# EAGLE board Qwiic-USB_Hub-Panel (EAGLE 9.6.2), part 1 of 2
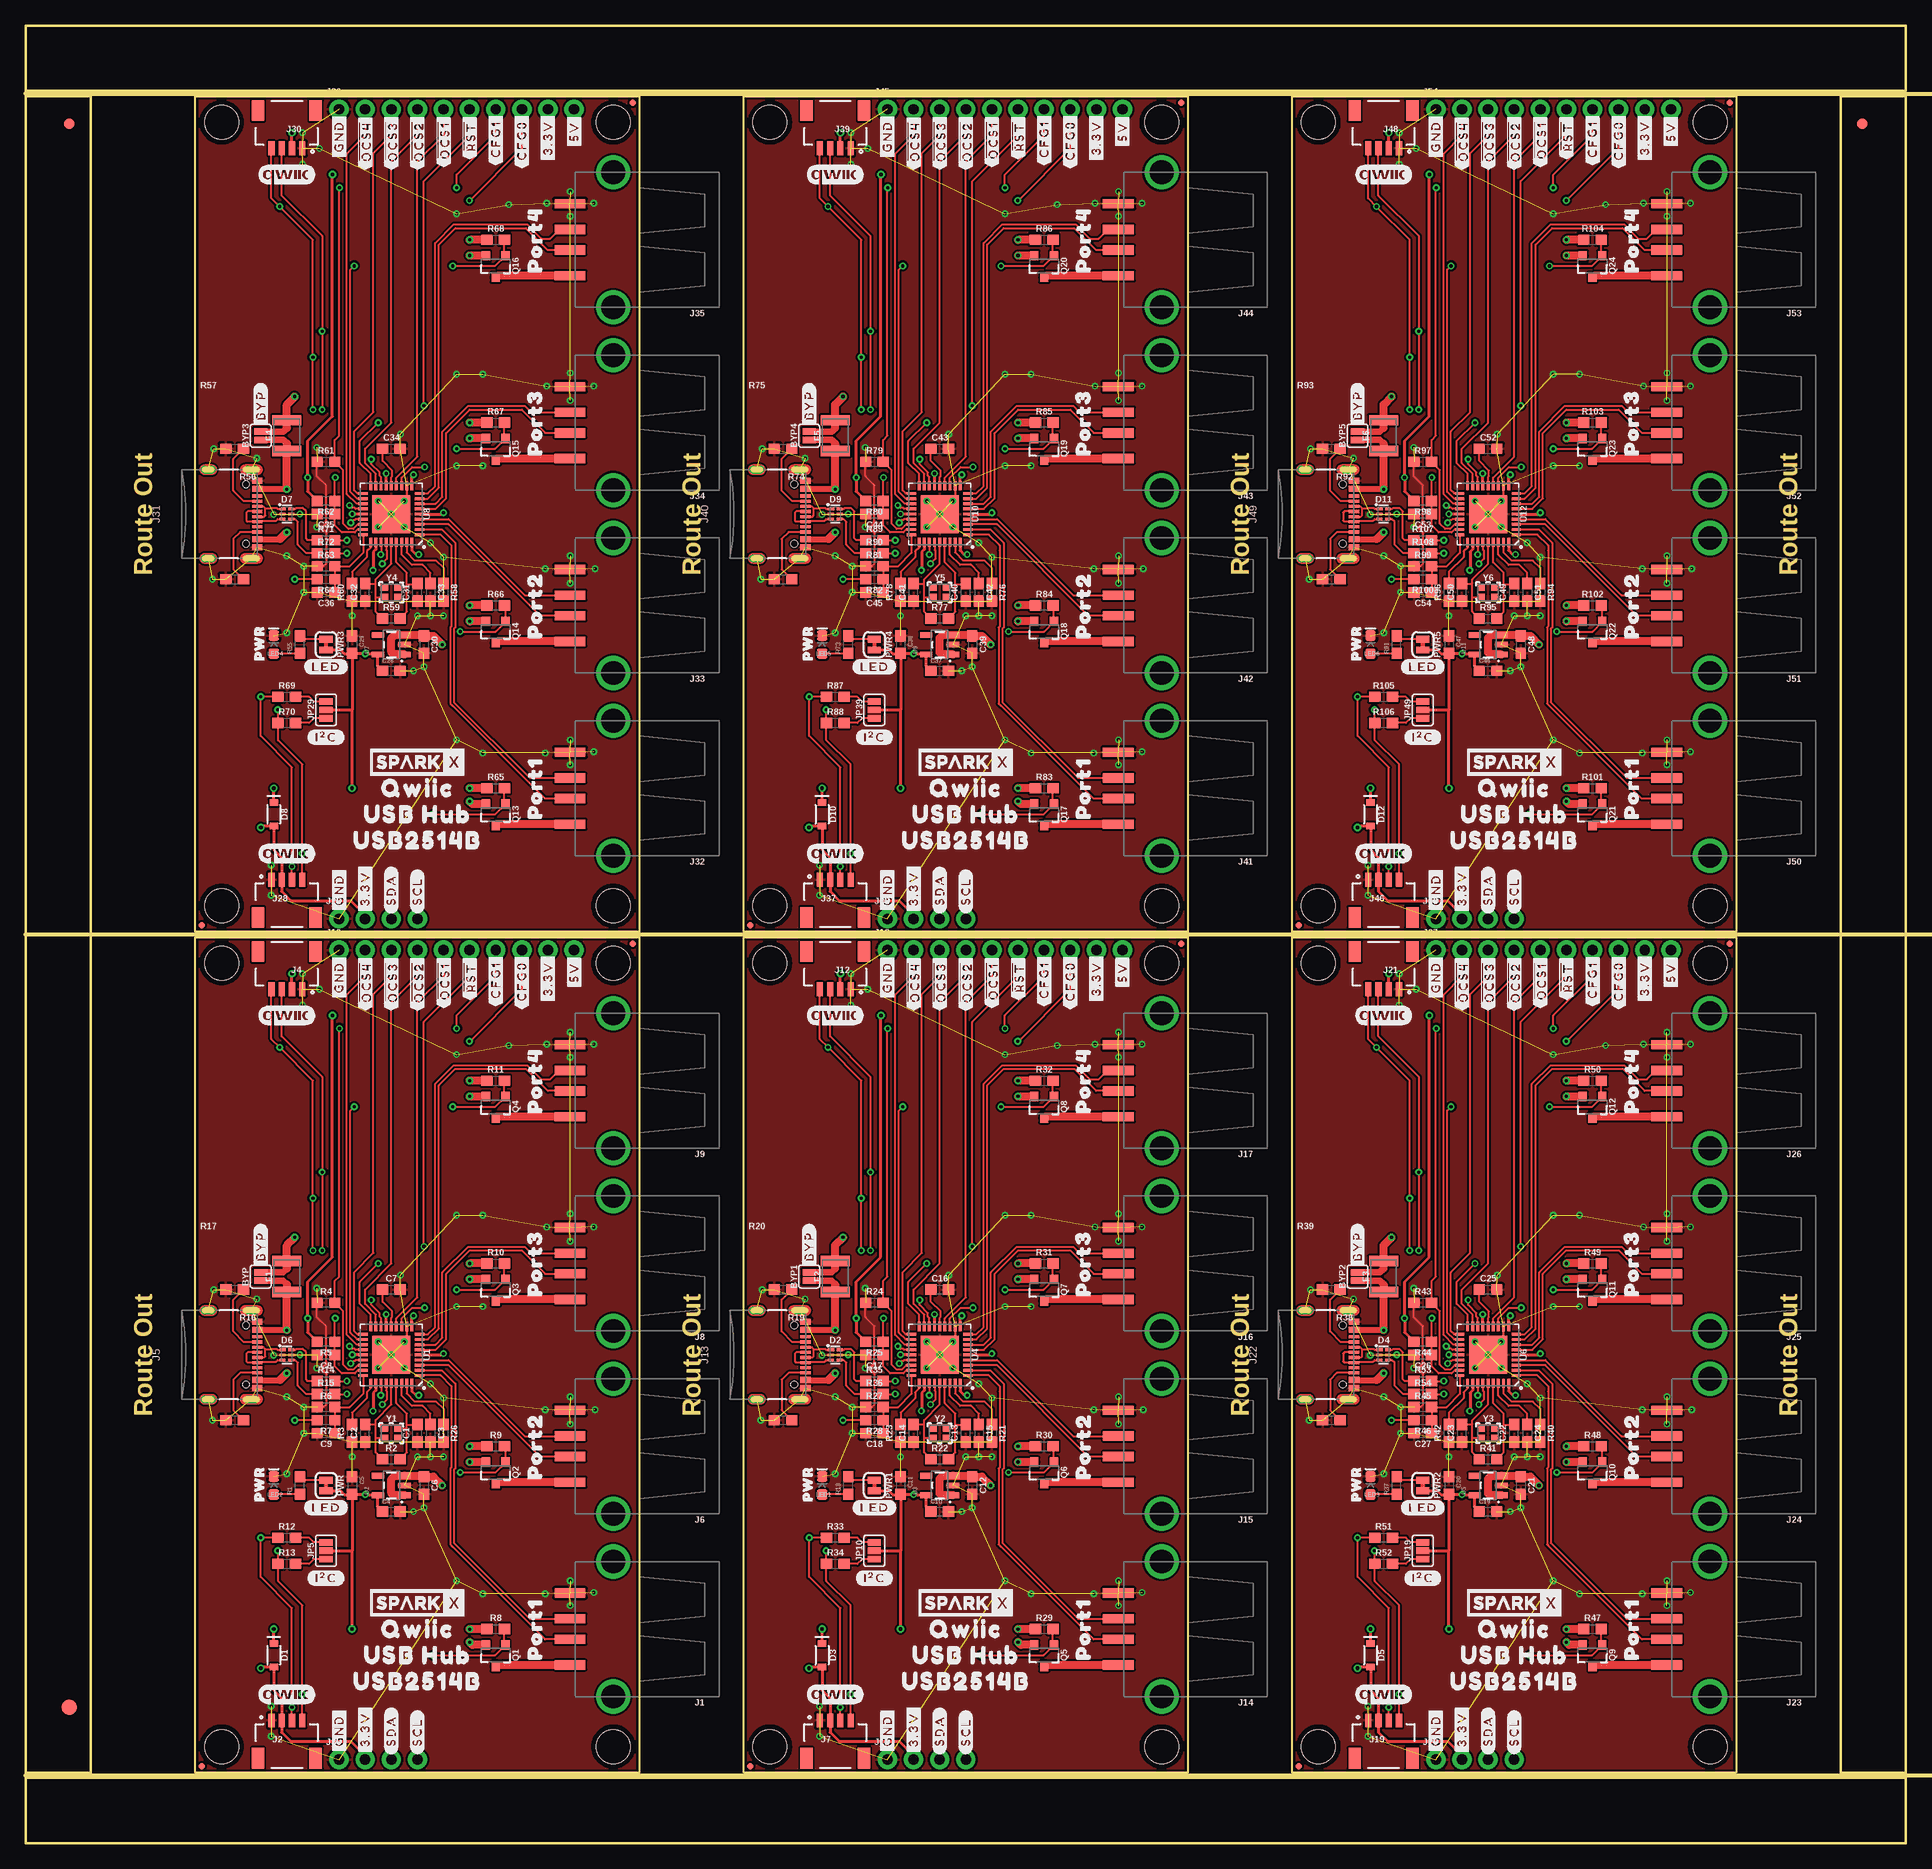
[diagram p0: board, top side]
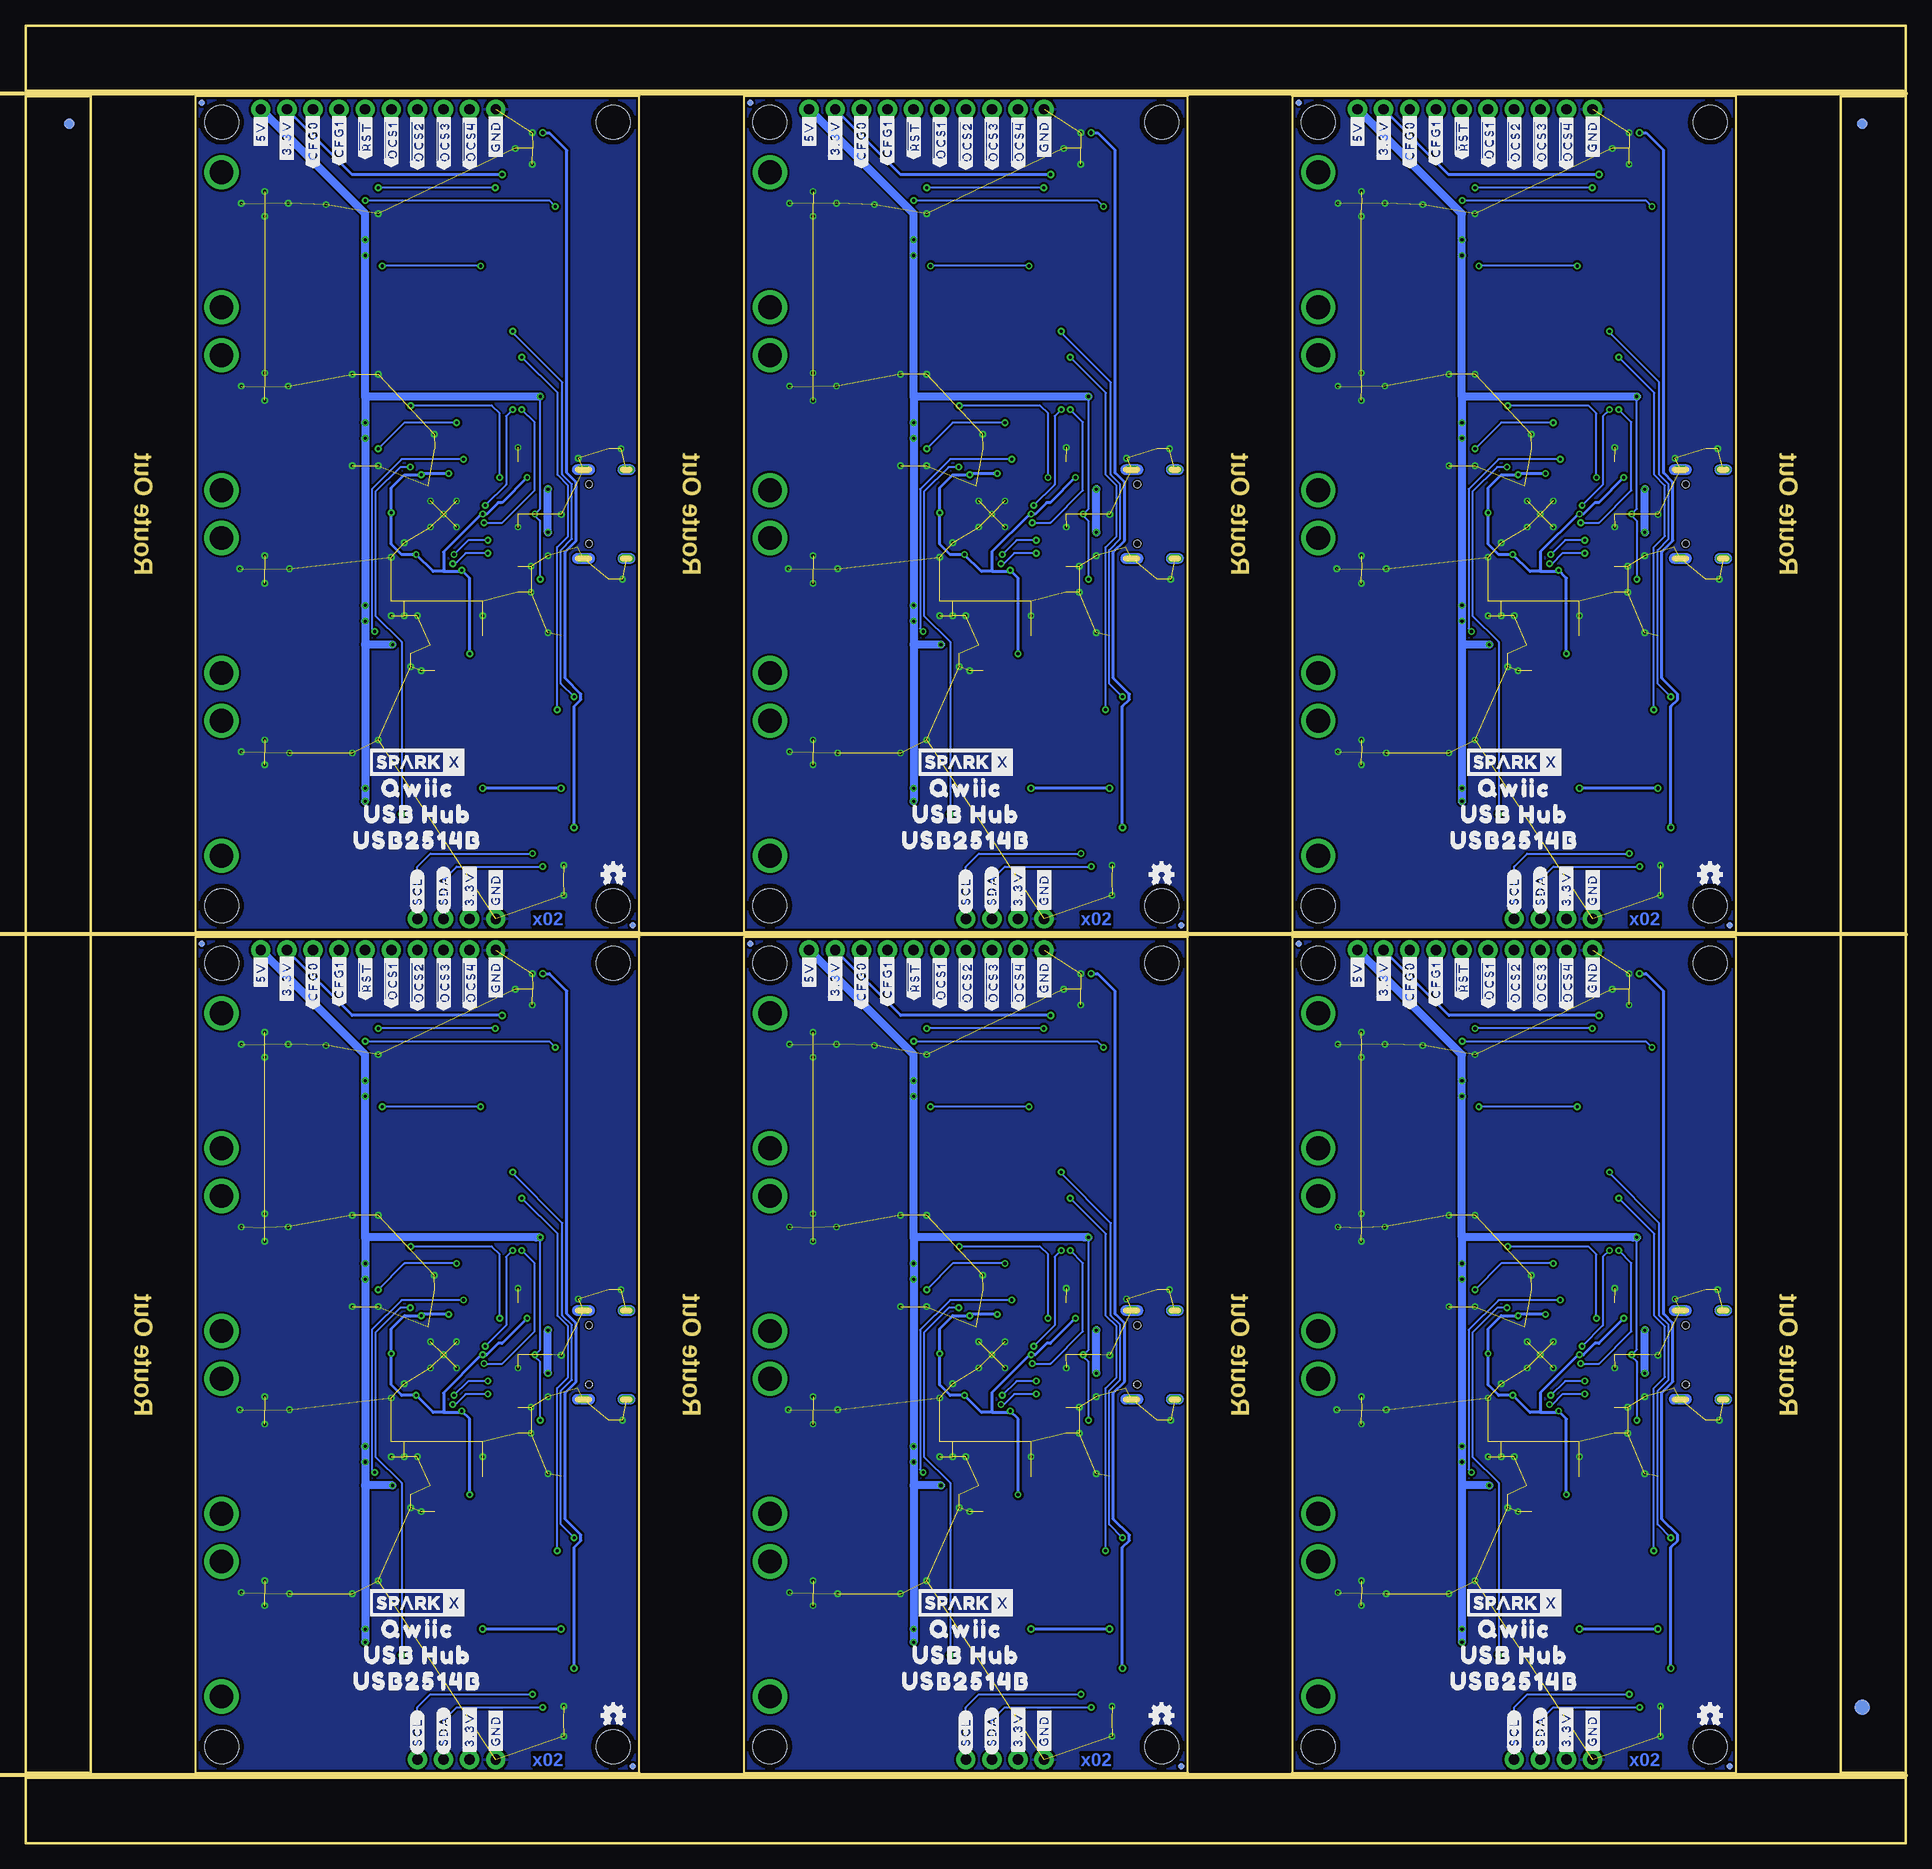
[diagram p1: board, bottom side, seen from below]

Size 182.88 x 176.78 mm. Coordinates in mm from the lower left corner, seen from the top.
Outline: 59.69,6.86 16.51,6.86 16.51,88.14 59.69,88.14 59.69,6.86
Outline: 113.03,6.86 69.85,6.86 69.85,88.14 113.03,88.14 113.03,6.86
Outline: 166.37,6.86 123.19,6.86 123.19,88.14 166.37,88.14 166.37,6.86
Outline: 59.69,88.65 16.51,88.65 16.51,169.93 59.69,169.93 59.69,88.65
Outline: 113.03,88.65 69.85,88.65 69.85,169.93 113.03,169.93 113.03,88.65
Outline: 166.37,88.65 123.19,88.65 123.19,169.93 166.37,169.93 166.37,88.65
Outline: 0,6.35 182.88,6.35 182.88,0 0,0 0,6.35
Outline: 176.53,169.93 182.88,169.93 182.88,6.86 176.53,6.86 176.53,169.93
Outline: 0,176.78 182.88,176.78 182.88,170.43 0,170.43 0,176.78
Outline: 0,169.93 6.35,169.93 6.35,6.86 0,6.86 0,169.93
Copper layers (1*16): Top 0.035mm / dielectric 1.5mm / Bottom 0.035mm
Design rules "Qwiic-USB_Hub": minimum track width 7mil, minimum drill 0.3mm, track to track 7mil, track to pad 7mil, pad to pad 7mil, via to via 7mil, smd to smd 7mil, copper to edge 7mil, drill to drill 7mil, minimum pad ring 7mil, minimum via ring 7mil, stop-mask expansion 4mil, vias tented up to drill 25mil, thermal gap 10mil
Net classes: 2 3.3V: width 0.305 mm
Milling: 3 lines

## Footprints (pad centres in the part's own frame; a part is rotated, then mirrored left to right if it is on the bottom)
SMT-JUMPER_2_NO_SILK = smd 0.635 x 1.27: 1 -0.406,0; 2 0.406,0
0603 = smd 1.1 x 1: 1 -0.85,0; 2 0.85,0
SOD-323 = smd 0.63 x 0.83: A 1.15,0; C -1.15,0
SOT886 = smd 0.61 x 0.25: 1 -0.405,0.5 | smd 0.56 x 0.25: 2 -0.43,0; 3 -0.43,-0.5; 4 0.43,-0.5; 5 0.43,0; 6 0.43,0.5
FIDUCIAL-1X2 = smd 1 x 1: 1 0,0
FIDUCIAL-1.5X3 = smd 1.5 x 1.5: 1 0,0
1210 = smd 1 x 2.8: 1 -1.5,0; 2 1.5,0
USB-A-S-NOSILK-FEMALE = smd 3 x 0.9: D+ 6.752,-1; D- 6.752,1; GND 6.752,-3.5; VBUS 6.752,3.5 | drill 2.311: SHLD1 2.54,-6.566; SHLD2 2.54,6.566
JST04_1MM_RA = smd 0.6 x 1.35: 1 -1.5,0; 2 -0.5,0; 3 0.5,0; 4 1.5,0 | smd 1.2 x 2: NC1 2.8,-3.675; NC2 -2.8,-3.675
1X04_NO_SILK = drill 1.016 pad 1.88: 1 0,0; 2 2.54,0; 3 5.08,0; 4 7.62,0
USB-C-16P-2LAYER-PADS = smd 0.3 x 1: A5 -1.25,-0.34; A6 -0.25,-0.34; A7 0.25,-0.34; A8 1.25,-0.34; B5 1.75,-0.34; B6 0.75,-0.34; B7 -0.75,-0.34; B8 -1.75,-0.34 | smd 0.6 x 1: GND -3.225,-0.34; GND2 3.225,-0.34; VBUS1 -2.45,-0.34; VBUS2 2.45,-0.34 | drill 0.4 pad 0.6 long: SHLD1 -4.318,-0.915; SHLD2 4.318,-0.915; SHLD3 -4.318,-5.095; SHLD4 4.318,-5.095 | hole 0.65: -2.89,-1.445; 2.89,-1.445
1X10_NO_SILK = drill 1.016 pad 1.88: 1 0,0; 2 2.54,0; 3 5.08,0; 4 7.62,0; 5 10.16,0; 6 12.7,0; 7 15.24,0; 8 17.78,0; 9 20.32,0; 10 22.86,0
STAND-OFF = hole 3.302: 0,0
MICRO-FIDUCIAL = smd 0.635 x 0.635: 1 0,0
SMT-JUMPER_3_NO_SILK = smd 0.635 x 1.27: 1 -0.813,0; 2 0,0; 3 0.813,0
LED-0603 = smd 1 x 1: A -0.877,0; C 0.877,0
SMT-JUMPER_2_NC_TRACE_SILK = smd 0.66 x 1.27: 1 -0.521,0; 2 0.521,0
SOT23-3 = smd 0.8 x 0.9: 1 -0.95,-1; 2 0.95,-1; 3 0,1.1
QFN-36 = smd 0.9 x 0.28: 1 -2.75,2; 2 -2.75,1.5; 3 -2.75,1; 4 -2.75,0.5; 5 -2.75,0; 6 -2.75,-0.5; 7 -2.75,-1; 8 -2.75,-1.5; 9 -2.75,-2; 19 2.75,-2; 20 2.75,-1.5; 21 2.75,-1; 22 2.75,-0.5; 23 2.75,0; 24 2.75,0.5; 25 2.75,1; 26 2.75,1.5; 27 2.75,2 | smd 0.28 x 0.9: 10 -2,-2.75; 11 -1.5,-2.75; 12 -1,-2.75; 13 -0.5,-2.75; 14 0,-2.75; 15 0.5,-2.75; 16 1,-2.75; 17 1.5,-2.75; 18 2,-2.75; 28 2,2.75; 29 1.5,2.75; 30 1,2.75; 31 0.5,2.75; 32 0,2.75; 33 -0.5,2.75; 34 -1,2.75; 35 -1.5,2.75; 36 -2,2.75 | smd 3.7 x 3.7: EP 0,0
SOT23-5 = smd 0.55 x 1.2: 1 -0.95,-1.3; 2 0,-1.3; 3 0.95,-1.3; 4 0.95,1.3; 5 -0.95,1.3
CRYSTAL-SMD-2.0X1.6MM = smd 0.75 x 0.7: 1 -0.675,-0.5; 2 0.675,-0.5; 3 0.675,0.5; 4 -0.675,0.5

## Placement (x,y rotation side)
BYP  JUMPER-SMT_2_NO_SILK  [SMT-JUMPER_2_NO_SILK]  22.86,55.12 90 top
BYP1  JUMPER-SMT_2_NO_SILK  [SMT-JUMPER_2_NO_SILK]  76.2,55.12 90 top
BYP2  JUMPER-SMT_2_NO_SILK  [SMT-JUMPER_2_NO_SILK]  129.54,55.12 90 top
BYP3  JUMPER-SMT_2_NO_SILK  [SMT-JUMPER_2_NO_SILK]  22.86,136.91 90 top
BYP4  JUMPER-SMT_2_NO_SILK  [SMT-JUMPER_2_NO_SILK]  76.2,136.91 90 top
BYP5  JUMPER-SMT_2_NO_SILK  [SMT-JUMPER_2_NO_SILK]  129.54,136.91 90 top
C1  18pF  [0603]  38.1,39.88 90 top
C2  18pF  [0603]  33.02,39.88 90 top
C3  0.1uF  [0603]  39.37,39.88 270 top
C4  1.0uF  [0603]  35.56,32.26 0 top
C5  0.1uF  [0603]  31.75,34.8 270 top
C6  1.0uF  [0603]  38.73,34.8 270 top
C7  0.1uF  [0603]  35.56,53.85 0 top
C8  0.1uF  [0603]  29.21,47.5 180 top
C9  0.1uF  [0603]  29.21,39.88 180 top
C10  1.0uF  [0603]  88.9,32.26 0 top
C11  0.1uF  [0603]  85.09,34.8 270 top
C12  1.0uF  [0603]  92.08,34.8 270 top
C13  18pF  [0603]  91.44,39.88 90 top
C14  18pF  [0603]  86.36,39.88 90 top
C15  0.1uF  [0603]  92.71,39.88 270 top
C16  0.1uF  [0603]  88.9,53.85 0 top
C17  0.1uF  [0603]  82.55,47.5 180 top
C18  0.1uF  [0603]  82.55,39.88 180 top
C19  1.0uF  [0603]  142.24,32.26 0 top
C20  0.1uF  [0603]  138.43,34.8 270 top
C21  1.0uF  [0603]  145.41,34.8 270 top
C22  18pF  [0603]  144.78,39.88 90 top
C23  18pF  [0603]  139.7,39.88 90 top
C24  0.1uF  [0603]  146.05,39.88 270 top
C25  0.1uF  [0603]  142.24,53.85 0 top
C26  0.1uF  [0603]  135.89,47.5 180 top
C27  0.1uF  [0603]  135.89,39.88 180 top
C28  1.0uF  [0603]  35.56,114.05 0 top
C29  0.1uF  [0603]  31.75,116.59 270 top
C30  1.0uF  [0603]  38.73,116.59 270 top
C31  18pF  [0603]  38.1,121.67 90 top
C32  18pF  [0603]  33.02,121.67 90 top
C33  0.1uF  [0603]  39.37,121.67 270 top
C34  0.1uF  [0603]  35.56,135.64 0 top
C35  0.1uF  [0603]  29.21,129.29 180 top
C36  0.1uF  [0603]  29.21,121.67 180 top
C37  1.0uF  [0603]  88.9,114.05 0 top
C38  0.1uF  [0603]  85.09,116.59 270 top
C39  1.0uF  [0603]  92.08,116.59 270 top
C40  18pF  [0603]  91.44,121.67 90 top
C41  18pF  [0603]  86.36,121.67 90 top
C42  0.1uF  [0603]  92.71,121.67 270 top
C43  0.1uF  [0603]  88.9,135.64 0 top
C44  0.1uF  [0603]  82.55,129.29 180 top
C45  0.1uF  [0603]  82.55,121.67 180 top
C46  1.0uF  [0603]  142.24,114.05 0 top
C47  0.1uF  [0603]  138.43,116.59 270 top
C48  1.0uF  [0603]  145.41,116.59 270 top
C49  18pF  [0603]  144.78,121.67 90 top
C50  18pF  [0603]  139.7,121.67 90 top
C51  0.1uF  [0603]  146.05,121.67 270 top
C52  0.1uF  [0603]  142.24,135.64 0 top
C53  0.1uF  [0603]  135.89,129.29 180 top
C54  0.1uF  [0603]  135.89,121.67 180 top
D1  3A/10V/280mV  [SOD-323]  24.13,18.29 270 top
D2  PRTR5V0U2F  [SOT886]  78.74,47.5 0 top
D3  3A/10V/280mV  [SOD-323]  77.47,18.29 270 top
D4  PRTR5V0U2F  [SOT886]  132.08,47.5 0 top
D5  3A/10V/280mV  [SOD-323]  130.81,18.29 270 top
D6  PRTR5V0U2F  [SOT886]  25.4,47.5 0 top
D7  PRTR5V0U2F  [SOT886]  25.4,129.29 0 top
D8  3A/10V/280mV  [SOD-323]  24.13,100.08 270 top
D9  PRTR5V0U2F  [SOT886]  78.74,129.29 0 top
D10  3A/10V/280mV  [SOD-323]  77.47,100.08 270 top
D11  PRTR5V0U2F  [SOT886]  132.08,129.29 0 top
D12  3A/10V/280mV  [SOD-323]  130.81,100.08 270 top
E$1  [FIDUCIAL-1X2]  4.23,167.26 0 top
E$2  [FIDUCIAL-1X2]  4.23,167.26 0 bottom
E$3  [FIDUCIAL-1X2]  178.65,167.26 0 top
E$4  [FIDUCIAL-1X2]  178.65,167.26 0 bottom
E$5  [FIDUCIAL-1.5X3]  4.23,13.21 0 top
E$6  [FIDUCIAL-1.5X3]  4.23,13.21 0 bottom
F1  6V/2A  [1210]  25.4,55.12 90 top
F2  6V/2A  [1210]  78.74,55.12 90 top
F3  6V/2A  [1210]  132.08,55.12 90 top
F4  6V/2A  [1210]  25.4,136.91 90 top
F5  6V/2A  [1210]  78.74,136.91 90 top
F6  6V/2A  [1210]  132.08,136.91 90 top
J1  USB_A_FEMALE  [USB-A-S-NOSILK-FEMALE]  59.69,20.83 180 top
J2  Qwiic Right Angle  [JST04_1MM_RA]  25.4,11.94 0 top
J3  PTH  [1X04_NO_SILK]  30.48,8.13 0 top
J4  Qwiic Right Angle  [JST04_1MM_RA]  25.4,83.06 180 top
J5  [USB-C-16P-2LAYER-PADS]  22.86,47.5 270 top
J6  USB_A_FEMALE  [USB-A-S-NOSILK-FEMALE]  59.69,38.61 180 top
J7  Qwiic Right Angle  [JST04_1MM_RA]  78.74,11.94 0 top
J8  USB_A_FEMALE  [USB-A-S-NOSILK-FEMALE]  59.69,56.39 180 top
J9  USB_A_FEMALE  [USB-A-S-NOSILK-FEMALE]  59.69,74.17 180 top
J10  [1X10_NO_SILK]  30.48,86.87 0 top
J11  PTH  [1X04_NO_SILK]  83.82,8.13 0 top
J12  Qwiic Right Angle  [JST04_1MM_RA]  78.74,83.06 180 top
J13  [USB-C-16P-2LAYER-PADS]  76.2,47.5 270 top
J14  USB_A_FEMALE  [USB-A-S-NOSILK-FEMALE]  113.03,20.83 180 top
J15  USB_A_FEMALE  [USB-A-S-NOSILK-FEMALE]  113.03,38.61 180 top
J16  USB_A_FEMALE  [USB-A-S-NOSILK-FEMALE]  113.03,56.39 180 top
J17  USB_A_FEMALE  [USB-A-S-NOSILK-FEMALE]  113.03,74.17 180 top
J18  [1X10_NO_SILK]  83.82,86.87 0 top
J19  Qwiic Right Angle  [JST04_1MM_RA]  132.08,11.94 0 top
J20  PTH  [1X04_NO_SILK]  137.16,8.13 0 top
J21  Qwiic Right Angle  [JST04_1MM_RA]  132.08,83.06 180 top
J22  [USB-C-16P-2LAYER-PADS]  129.54,47.5 270 top
J23  USB_A_FEMALE  [USB-A-S-NOSILK-FEMALE]  166.37,20.83 180 top
J24  USB_A_FEMALE  [USB-A-S-NOSILK-FEMALE]  166.37,38.61 180 top
J25  USB_A_FEMALE  [USB-A-S-NOSILK-FEMALE]  166.37,56.39 180 top
J26  USB_A_FEMALE  [USB-A-S-NOSILK-FEMALE]  166.37,74.17 180 top
J27  [1X10_NO_SILK]  137.16,86.87 0 top
J28  Qwiic Right Angle  [JST04_1MM_RA]  25.4,93.73 0 top
J29  PTH  [1X04_NO_SILK]  30.48,89.92 0 top
J30  Qwiic Right Angle  [JST04_1MM_RA]  25.4,164.85 180 top
J31  [USB-C-16P-2LAYER-PADS]  22.86,129.29 270 top
J32  USB_A_FEMALE  [USB-A-S-NOSILK-FEMALE]  59.69,102.62 180 top
J33  USB_A_FEMALE  [USB-A-S-NOSILK-FEMALE]  59.69,120.4 180 top
J34  USB_A_FEMALE  [USB-A-S-NOSILK-FEMALE]  59.69,138.18 180 top
J35  USB_A_FEMALE  [USB-A-S-NOSILK-FEMALE]  59.69,155.96 180 top
J36  [1X10_NO_SILK]  30.48,168.66 0 top
J37  Qwiic Right Angle  [JST04_1MM_RA]  78.74,93.73 0 top
J38  PTH  [1X04_NO_SILK]  83.82,89.92 0 top
J39  Qwiic Right Angle  [JST04_1MM_RA]  78.74,164.85 180 top
J40  [USB-C-16P-2LAYER-PADS]  76.2,129.29 270 top
J41  USB_A_FEMALE  [USB-A-S-NOSILK-FEMALE]  113.03,102.62 180 top
J42  USB_A_FEMALE  [USB-A-S-NOSILK-FEMALE]  113.03,120.4 180 top
J43  USB_A_FEMALE  [USB-A-S-NOSILK-FEMALE]  113.03,138.18 180 top
J44  USB_A_FEMALE  [USB-A-S-NOSILK-FEMALE]  113.03,155.96 180 top
J45  [1X10_NO_SILK]  83.82,168.66 0 top
J46  Qwiic Right Angle  [JST04_1MM_RA]  132.08,93.73 0 top
J47  PTH  [1X04_NO_SILK]  137.16,89.92 0 top
J48  Qwiic Right Angle  [JST04_1MM_RA]  132.08,164.85 180 top
J49  [USB-C-16P-2LAYER-PADS]  129.54,129.29 270 top
J50  USB_A_FEMALE  [USB-A-S-NOSILK-FEMALE]  166.37,102.62 180 top
J51  USB_A_FEMALE  [USB-A-S-NOSILK-FEMALE]  166.37,120.4 180 top
J52  USB_A_FEMALE  [USB-A-S-NOSILK-FEMALE]  166.37,138.18 180 top
J53  USB_A_FEMALE  [USB-A-S-NOSILK-FEMALE]  166.37,155.96 180 top
J54  [1X10_NO_SILK]  137.16,168.66 0 top
JP1  STAND-OFF  [STAND-OFF]  72.39,9.4 90 top
JP2  STAND-OFF  [STAND-OFF]  72.39,85.6 90 top
JP3  FIDUCIALUFIDUCIAL  [MICRO-FIDUCIAL]  112.4,87.5 90 top
JP4  FIDUCIALUFIDUCIAL  [MICRO-FIDUCIAL]  70.48,7.49 90 top
JP5  [SMT-JUMPER_3_NO_SILK]  29.21,28.45 90 top
JP6  FIDUCIALUFIDUCIAL  [MICRO-FIDUCIAL]  112.4,87.5 270 bottom
JP7  FIDUCIALUFIDUCIAL  [MICRO-FIDUCIAL]  70.48,7.49 270 bottom
JP8  STAND-OFF  [STAND-OFF]  110.49,9.4 90 top
JP9  STAND-OFF  [STAND-OFF]  110.49,85.6 90 top
JP10  [SMT-JUMPER_3_NO_SILK]  82.55,28.45 90 top
JP11  STAND-OFF  [STAND-OFF]  125.73,9.4 90 top
JP12  STAND-OFF  [STAND-OFF]  125.73,85.6 90 top
JP13  FIDUCIALUFIDUCIAL  [MICRO-FIDUCIAL]  165.73,87.5 90 top
JP14  FIDUCIALUFIDUCIAL  [MICRO-FIDUCIAL]  123.83,7.49 90 top
JP15  FIDUCIALUFIDUCIAL  [MICRO-FIDUCIAL]  165.73,87.5 270 bottom
JP16  FIDUCIALUFIDUCIAL  [MICRO-FIDUCIAL]  123.83,7.49 270 bottom
JP17  STAND-OFF  [STAND-OFF]  163.83,9.4 90 top
JP18  STAND-OFF  [STAND-OFF]  163.83,85.6 90 top
JP19  [SMT-JUMPER_3_NO_SILK]  135.89,28.45 90 top
JP20  STAND-OFF  [STAND-OFF]  19.05,91.19 90 top
JP21  FIDUCIALUFIDUCIAL  [MICRO-FIDUCIAL]  59.06,87.5 90 top
JP22  STAND-OFF  [STAND-OFF]  19.05,167.39 90 top
JP23  FIDUCIALUFIDUCIAL  [MICRO-FIDUCIAL]  59.06,169.29 90 top
JP24  FIDUCIALUFIDUCIAL  [MICRO-FIDUCIAL]  17.15,89.28 90 top
JP25  FIDUCIALUFIDUCIAL  [MICRO-FIDUCIAL]  59.06,169.29 270 bottom
JP26  FIDUCIALUFIDUCIAL  [MICRO-FIDUCIAL]  17.15,89.28 270 bottom
JP27  STAND-OFF  [STAND-OFF]  57.15,91.19 90 top
JP28  STAND-OFF  [STAND-OFF]  57.15,167.39 90 top
JP29  [SMT-JUMPER_3_NO_SILK]  29.21,110.24 90 top
JP30  STAND-OFF  [STAND-OFF]  72.39,91.19 90 top
JP31  STAND-OFF  [STAND-OFF]  19.05,9.4 90 top
JP32  STAND-OFF  [STAND-OFF]  72.39,167.39 90 top
JP33  FIDUCIALUFIDUCIAL  [MICRO-FIDUCIAL]  112.4,169.29 90 top
JP34  FIDUCIALUFIDUCIAL  [MICRO-FIDUCIAL]  70.48,89.28 90 top
JP35  FIDUCIALUFIDUCIAL  [MICRO-FIDUCIAL]  112.4,169.29 270 bottom
JP36  FIDUCIALUFIDUCIAL  [MICRO-FIDUCIAL]  70.48,89.28 270 bottom
JP37  STAND-OFF  [STAND-OFF]  110.49,91.19 90 top
JP38  STAND-OFF  [STAND-OFF]  110.49,167.39 90 top
JP39  [SMT-JUMPER_3_NO_SILK]  82.55,110.24 90 top
JP40  STAND-OFF  [STAND-OFF]  125.73,91.19 90 top
JP41  STAND-OFF  [STAND-OFF]  19.05,85.6 90 top
JP42  STAND-OFF  [STAND-OFF]  125.73,167.39 90 top
JP43  FIDUCIALUFIDUCIAL  [MICRO-FIDUCIAL]  165.73,169.29 90 top
JP44  FIDUCIALUFIDUCIAL  [MICRO-FIDUCIAL]  123.83,89.28 90 top
JP45  FIDUCIALUFIDUCIAL  [MICRO-FIDUCIAL]  165.73,169.29 270 bottom
JP46  FIDUCIALUFIDUCIAL  [MICRO-FIDUCIAL]  123.83,89.28 270 bottom
JP47  STAND-OFF  [STAND-OFF]  163.83,91.19 90 top
JP48  STAND-OFF  [STAND-OFF]  163.83,167.39 90 top
JP49  [SMT-JUMPER_3_NO_SILK]  135.89,110.24 90 top
JP61  FIDUCIALUFIDUCIAL  [MICRO-FIDUCIAL]  17.15,7.49 90 top
JP71  FIDUCIALUFIDUCIAL  [MICRO-FIDUCIAL]  59.06,87.5 270 bottom
JP81  FIDUCIALUFIDUCIAL  [MICRO-FIDUCIAL]  17.15,7.49 270 bottom
JP91  STAND-OFF  [STAND-OFF]  57.15,9.4 90 top
JP101  STAND-OFF  [STAND-OFF]  57.15,85.6 90 top
LED1  RED  [LED-0603]  77.47,34.8 90 top
LED2  RED  [LED-0603]  24.13,34.8 90 top
LED3  RED  [LED-0603]  130.81,34.8 90 top
LED4  RED  [LED-0603]  24.13,116.59 90 top
LED5  RED  [LED-0603]  77.47,116.59 90 top
LED6  RED  [LED-0603]  130.81,116.59 90 top
LOGO1  OSHW-LOGOMINI  [OSHW-LOGO-MINI]  19.05,12.45 0 bottom
LOGO2  QWIIC_LOGO_CONNECTOR  [QWIIC_5.5MM]  25.4,80.52 0 top
LOGO3  OSHW-LOGOMINI  [OSHW-LOGO-MINI]  72.39,12.45 0 bottom
LOGO4  QWIIC_LOGO_CONNECTOR  [QWIIC_5.5MM]  78.74,80.52 0 top
LOGO5  OSHW-LOGOMINI  [OSHW-LOGO-MINI]  125.73,12.45 0 bottom
LOGO6  QWIIC_LOGO_CONNECTOR  [QWIIC_5.5MM]  132.08,80.52 0 top
LOGO7  OSHW-LOGOMINI  [OSHW-LOGO-MINI]  19.05,94.23 0 bottom
LOGO8  QWIIC_LOGO_CONNECTOR  [QWIIC_5.5MM]  25.4,162.31 0 top
LOGO9  OSHW-LOGOMINI  [OSHW-LOGO-MINI]  72.39,94.23 0 bottom
LOGO10  QWIIC_LOGO_CONNECTOR  [QWIIC_5.5MM]  78.74,162.31 0 top
LOGO11  OSHW-LOGOMINI  [OSHW-LOGO-MINI]  125.73,94.23 0 bottom
LOGO12  QWIIC_LOGO_CONNECTOR  [QWIIC_5.5MM]  132.08,162.31 0 top
PWR  [SMT-JUMPER_2_NC_TRACE_SILK]  29.21,34.8 270 top
PWR1  [SMT-JUMPER_2_NC_TRACE_SILK]  82.55,34.8 270 top
PWR2  [SMT-JUMPER_2_NC_TRACE_SILK]  135.89,34.8 270 top
PWR3  [SMT-JUMPER_2_NC_TRACE_SILK]  29.21,116.59 270 top
PWR4  [SMT-JUMPER_2_NC_TRACE_SILK]  82.55,116.59 270 top
PWR5  [SMT-JUMPER_2_NC_TRACE_SILK]  135.89,116.59 270 top
Q1  4.3A/20V/54mΩ  [SOT23-3]  45.72,18.29 180 top
Q2  4.3A/20V/54mΩ  [SOT23-3]  45.72,36.07 180 top
Q3  4.3A/20V/54mΩ  [SOT23-3]  45.72,53.85 180 top
Q4  4.3A/20V/54mΩ  [SOT23-3]  45.72,71.63 180 top
Q5  4.3A/20V/54mΩ  [SOT23-3]  99.06,18.29 180 top
Q6  4.3A/20V/54mΩ  [SOT23-3]  99.06,36.07 180 top
Q7  4.3A/20V/54mΩ  [SOT23-3]  99.06,53.85 180 top
Q8  4.3A/20V/54mΩ  [SOT23-3]  99.06,71.63 180 top
Q9  4.3A/20V/54mΩ  [SOT23-3]  152.4,18.29 180 top
Q10  4.3A/20V/54mΩ  [SOT23-3]  152.4,36.07 180 top
Q11  4.3A/20V/54mΩ  [SOT23-3]  152.4,53.85 180 top
Q12  4.3A/20V/54mΩ  [SOT23-3]  152.4,71.63 180 top
Q13  4.3A/20V/54mΩ  [SOT23-3]  45.72,100.08 180 top
Q14  4.3A/20V/54mΩ  [SOT23-3]  45.72,117.86 180 top
Q15  4.3A/20V/54mΩ  [SOT23-3]  45.72,135.64 180 top
Q16  4.3A/20V/54mΩ  [SOT23-3]  45.72,153.42 180 top
Q17  4.3A/20V/54mΩ  [SOT23-3]  99.06,100.08 180 top
Q18  4.3A/20V/54mΩ  [SOT23-3]  99.06,117.86 180 top
Q19  4.3A/20V/54mΩ  [SOT23-3]  99.06,135.64 180 top
Q20  4.3A/20V/54mΩ  [SOT23-3]  99.06,153.42 180 top
Q21  4.3A/20V/54mΩ  [SOT23-3]  152.4,100.08 180 top
Q22  4.3A/20V/54mΩ  [SOT23-3]  152.4,117.86 180 top
Q23  4.3A/20V/54mΩ  [SOT23-3]  152.4,135.64 180 top
Q24  4.3A/20V/54mΩ  [SOT23-3]  152.4,153.42 180 top
R1  1k  [0603]  26.67,34.8 90 top
R2  1M  [0603]  35.56,37.34 0 top
R3  100k  [0603]  31.75,39.88 90 top
R4  100k  [0603]  29.21,52.58 0 top
R5  100k  [0603]  29.21,48.77 180 top
R6  100k  [0603]  29.21,42.42 0 top
R7  100k  [0603]  29.21,41.15 180 top
R8  100k  [0603]  45.72,20.83 0 top
R9  100k  [0603]  45.72,38.61 0 top
R10  100k  [0603]  45.72,56.39 0 top
R11  100k  [0603]  45.72,74.17 0 top
R12  2.2k  [0603]  25.4,29.72 0 top
R13  2.2k  [0603]  25.4,27.18 0 top
R14  22  [0603]  29.21,44.96 0 top
R15  22  [0603]  29.21,43.69 0 top
R16  5.1k  [0603]  20.32,41.15 0 top
R17  5.1k  [0603]  20.32,53.85 0 top
R18  1k  [0603]  80.01,34.8 90 top
R19  5.1k  [0603]  73.66,41.15 0 top
R20  5.1k  [0603]  73.66,53.85 0 top
R21  12k  [0603]  93.98,39.88 270 top
R22  1M  [0603]  88.9,37.34 0 top
R23  100k  [0603]  85.09,39.88 90 top
R24  100k  [0603]  82.55,52.58 0 top
R25  100k  [0603]  82.55,48.77 180 top
R26  12k  [0603]  40.64,39.88 270 top
R27  100k  [0603]  82.55,42.42 0 top
R28  100k  [0603]  82.55,41.15 180 top
R29  100k  [0603]  99.06,20.83 0 top
R30  100k  [0603]  99.06,38.61 0 top
R31  100k  [0603]  99.06,56.39 0 top
R32  100k  [0603]  99.06,74.17 0 top
R33  2.2k  [0603]  78.74,29.72 0 top
R34  2.2k  [0603]  78.74,27.18 0 top
R35  22  [0603]  82.55,44.96 0 top
R36  22  [0603]  82.55,43.69 0 top
R37  1k  [0603]  133.35,34.8 90 top
R38  5.1k  [0603]  127,41.15 0 top
R39  5.1k  [0603]  127,53.85 0 top
R40  12k  [0603]  147.32,39.88 270 top
R41  1M  [0603]  142.24,37.34 0 top
R42  100k  [0603]  138.43,39.88 90 top
R43  100k  [0603]  135.89,52.58 0 top
R44  100k  [0603]  135.89,48.77 180 top
R45  100k  [0603]  135.89,42.42 0 top
R46  100k  [0603]  135.89,41.15 180 top
R47  100k  [0603]  152.4,20.83 0 top
R48  100k  [0603]  152.4,38.61 0 top
R49  100k  [0603]  152.4,56.39 0 top
R50  100k  [0603]  152.4,74.17 0 top
R51  2.2k  [0603]  132.08,29.72 0 top
R52  2.2k  [0603]  132.08,27.18 0 top
R53  22  [0603]  135.89,44.96 0 top
R54  22  [0603]  135.89,43.69 0 top
R55  1k  [0603]  26.67,116.59 90 top
R56  5.1k  [0603]  20.32,122.94 0 top
R57  5.1k  [0603]  20.32,135.64 0 top
R58  12k  [0603]  40.64,121.67 270 top
R59  1M  [0603]  35.56,119.13 0 top
R60  100k  [0603]  31.75,121.67 90 top
R61  100k  [0603]  29.21,134.37 0 top
R62  100k  [0603]  29.21,130.56 180 top
R63  100k  [0603]  29.21,124.21 0 top
R64  100k  [0603]  29.21,122.94 180 top
R65  100k  [0603]  45.72,102.62 0 top
R66  100k  [0603]  45.72,120.4 0 top
R67  100k  [0603]  45.72,138.18 0 top
R68  100k  [0603]  45.72,155.96 0 top
R69  2.2k  [0603]  25.4,111.51 0 top
R70  2.2k  [0603]  25.4,108.97 0 top
R71  22  [0603]  29.21,126.75 0 top
R72  22  [0603]  29.21,125.48 0 top
R73  1k  [0603]  80.01,116.59 90 top
R74  5.1k  [0603]  73.66,122.94 0 top
R75  5.1k  [0603]  73.66,135.64 0 top
R76  12k  [0603]  93.98,121.67 270 top
R77  1M  [0603]  88.9,119.13 0 top
R78  100k  [0603]  85.09,121.67 90 top
R79  100k  [0603]  82.55,134.37 0 top
R80  100k  [0603]  82.55,130.56 180 top
R81  100k  [0603]  82.55,124.21 0 top
R82  100k  [0603]  82.55,122.94 180 top
R83  100k  [0603]  99.06,102.62 0 top
R84  100k  [0603]  99.06,120.4 0 top
R85  100k  [0603]  99.06,138.18 0 top
R86  100k  [0603]  99.06,155.96 0 top
R87  2.2k  [0603]  78.74,111.51 0 top
R88  2.2k  [0603]  78.74,108.97 0 top
R89  22  [0603]  82.55,126.75 0 top
R90  22  [0603]  82.55,125.48 0 top
R91  1k  [0603]  133.35,116.59 90 top
R92  5.1k  [0603]  127,122.94 0 top
R93  5.1k  [0603]  127,135.64 0 top
R94  12k  [0603]  147.32,121.67 270 top
R95  1M  [0603]  142.24,119.13 0 top
R96  100k  [0603]  138.43,121.67 90 top
R97  100k  [0603]  135.89,134.37 0 top
R98  100k  [0603]  135.89,130.56 180 top
R99  100k  [0603]  135.89,124.21 0 top
R100  100k  [0603]  135.89,122.94 180 top
R101  100k  [0603]  152.4,102.62 0 top
R102  100k  [0603]  152.4,120.4 0 top
R103  100k  [0603]  152.4,138.18 0 top
R104  100k  [0603]  152.4,155.96 0 top
R105  2.2k  [0603]  132.08,111.51 0 top
R106  2.2k  [0603]  132.08,108.97 0 top
R107  22  [0603]  135.89,126.75 0 top
R108  22  [0603]  135.89,125.48 0 top
U1  USB251XB  [QFN-36]  35.56,47.5 180 top
U2  3.3V  [SOT23-5]  35.56,34.8 90 top
U3  3.3V  [SOT23-5]  88.9,34.8 90 top
U4  USB251XB  [QFN-36]  88.9,47.5 180 top
U5  3.3V  [SOT23-5]  142.24,34.8 90 top
U6  USB251XB  [QFN-36]  142.24,47.5 180 top
U7  3.3V  [SOT23-5]  35.56,116.59 90 top
U8  USB251XB  [QFN-36]  35.56,129.29 180 top
U9  3.3V  [SOT23-5]  88.9,116.59 90 top
U10  USB251XB  [QFN-36]  88.9,129.29 180 top
U11  3.3V  [SOT23-5]  142.24,116.59 90 top
U12  USB251XB  [QFN-36]  142.24,129.29 180 top
U$1  [PORT40]  49.53,74.17 90 top
U$2  [PORT31]  49.53,56.39 90 top
U$3  [PORT22]  49.53,38.61 90 top
U$4  [PORT13]  49.53,20.83 90 top
U$5  SPARKX-LOGO4  [SPARKX-MEDIUM]  38.1,23.37 0 top
U$6  [#3#3V#0]  33.02,11.05 90 bottom
U$7  [#SDA#0]  35.56,10.92 90 bottom
U$8  [#SCL#0]  38.1,10.79 90 bottom
U$9  [#GND#0]  30.48,10.92 90 bottom
U$10  [#I�C#1]  29.21,25.78 0 top
U$11  [#GND#5]  30.48,84.2 90 bottom
U$12  [PWR0]  22.73,34.92 90 top
U$13  [##RST##4]  43.18,84.2 90 top
U$14  [#3#3V#6]  50.8,84.07 90 top
U$15  [#5V#7]  53.34,84.71 90 top
U$16  [#GND#5]  30.48,84.2 90 top
U$17  [##OCS1##3]  40.64,83.82 90 top
U$18  [##OCS2##2]  38.1,83.69 90 top
U$19  [##OCS3##1]  35.56,83.69 90 top
U$20  [##OCS4##0]  33.02,83.69 90 top
U$21  [#BYP#0]  22.86,58.04 90 top
U$22  [QWIIC2]  38.1,20.83 0 top
U$23  [#LED#0]  29.21,32.64 0 top
U$24  [#CFG0#1]  48.26,83.82 90 top
U$25  [#CFG1#0]  45.72,83.95 90 top
U$26  [USB2514B0]  38.1,15.75 0 top
U$27  [USB_HUB1]  38.1,18.29 0 top
U$28  [#CFG1#0]  45.72,83.95 90 bottom
U$29  [#CFG0#1]  48.26,83.82 90 bottom
U$30  [##OCS1##3]  40.64,83.82 90 bottom
U$31  [##RST##4]  43.18,84.2 90 bottom
U$32  [#3#3V#6]  50.8,84.07 90 bottom
U$33  [#GND#0]  30.48,10.92 90 top
U$34  [#3#3V#0]  33.02,11.05 90 top
U$35  [#SDA#0]  35.56,10.92 90 top
U$36  [#SCL#0]  38.1,10.79 90 top
U$37  [#5V#7]  53.34,84.71 90 bottom
U$38  SPARKX-LOGO4  [SPARKX-MEDIUM]  38.1,23.37 0 bottom
U$39  [QWIIC2]  38.1,20.83 0 bottom
U$40  [USB_HUB1]  38.1,18.29 0 bottom
U$41  [USB2514B0]  38.1,15.75 0 bottom
U$42  [QWIIC_5.5MM]  25.4,14.48 0 top
U$43  [##OCS2##2]  38.1,83.69 90 bottom
U$44  [##OCS3##1]  35.56,83.69 90 bottom
U$45  [##OCS4##0]  33.02,83.69 90 bottom
U$46  [PORT40]  102.87,74.17 90 top
U$47  [PORT31]  102.87,56.39 90 top
U$48  [PORT22]  102.87,38.61 90 top
U$49  [PORT13]  102.87,20.83 90 top
U$50  SPARKX-LOGO4  [SPARKX-MEDIUM]  91.44,23.37 0 top
U$51  [#3#3V#0]  86.36,11.05 90 top
U$52  [#SDA#0]  88.9,10.92 90 top
U$53  [#SCL#0]  91.44,10.79 90 top
U$54  [#3#3V#0]  86.36,11.05 90 bottom
U$55  [#SDA#0]  88.9,10.92 90 bottom
U$56  [#SCL#0]  91.44,10.79 90 bottom
U$57  [#GND#0]  83.82,10.92 90 top
U$58  [#GND#0]  83.82,10.92 90 bottom
U$59  [#I�C#1]  82.55,25.78 0 top
U$60  [PWR0]  76.07,34.92 90 top
U$61  [##RST##4]  96.52,84.2 90 top
U$62  [#3#3V#6]  104.14,84.07 90 top
U$63  [#5V#7]  106.68,84.71 90 top
U$64  [#GND#5]  83.82,84.2 90 top
U$65  [#BYP#0]  76.2,58.04 90 top
U$66  [USB2514B0]  91.44,15.75 0 top
U$67  [QWIIC2]  91.44,20.83 0 top
U$68  [USB_HUB1]  91.44,18.29 0 top
U$69  [#LED#0]  82.55,32.64 0 top
U$70  [#GND#5]  83.82,84.2 90 bottom
U$71  [##RST##4]  96.52,84.2 90 bottom
U$72  [#3#3V#6]  104.14,84.07 90 bottom
U$73  [#5V#7]  106.68,84.71 90 bottom
U$74  SPARKX-LOGO4  [SPARKX-MEDIUM]  91.44,23.37 0 bottom
U$75  [QWIIC2]  91.44,20.83 0 bottom
U$76  [USB_HUB1]  91.44,18.29 0 bottom
U$77  [USB2514B0]  91.44,15.75 0 bottom
U$78  [QWIIC_5.5MM]  78.74,14.48 0 top
U$79  [##OCS1##3]  93.98,83.82 90 top
U$80  [##OCS2##2]  91.44,83.69 90 top
U$81  [##OCS3##1]  88.9,83.69 90 top
U$82  [##OCS4##0]  86.36,83.69 90 top
U$83  [#CFG0#1]  101.6,83.82 90 top
U$84  [#CFG1#0]  99.06,83.95 90 top
U$85  [#CFG1#0]  99.06,83.95 90 bottom
U$86  [#CFG0#1]  101.6,83.82 90 bottom
U$87  [##OCS1##3]  93.98,83.82 90 bottom
U$88  [##OCS2##2]  91.44,83.69 90 bottom
U$89  [##OCS3##1]  88.9,83.69 90 bottom
U$90  [##OCS4##0]  86.36,83.69 90 bottom
U$91  [PORT40]  156.21,74.17 90 top
U$92  [PORT31]  156.21,56.39 90 top
U$93  [PORT22]  156.21,38.61 90 top
U$94  [PORT13]  156.21,20.83 90 top
U$95  SPARKX-LOGO4  [SPARKX-MEDIUM]  144.78,23.37 0 top
U$96  [#3#3V#0]  139.7,11.05 90 top
U$97  [#SDA#0]  142.24,10.92 90 top
U$98  [#SCL#0]  144.78,10.79 90 top
U$99  [#3#3V#0]  139.7,11.05 90 bottom
U$100  [#SDA#0]  142.24,10.92 90 bottom
U$101  [#SCL#0]  144.78,10.79 90 bottom
U$102  [#GND#0]  137.16,10.92 90 top
U$103  [#GND#0]  137.16,10.92 90 bottom
U$104  [#I�C#1]  135.89,25.78 0 top
U$105  [PWR0]  129.41,34.92 90 top
U$106  [##RST##4]  149.86,84.2 90 top
U$107  [#3#3V#6]  157.48,84.07 90 top
U$108  [#5V#7]  160.02,84.71 90 top
U$109  [#GND#5]  137.16,84.2 90 top
U$110  [#BYP#0]  129.54,58.04 90 top
U$111  [USB2514B0]  144.78,15.75 0 top
U$112  [QWIIC2]  144.78,20.83 0 top
U$113  [USB_HUB1]  144.78,18.29 0 top
U$114  [#LED#0]  135.89,32.64 0 top
U$115  [#GND#5]  137.16,84.2 90 bottom
U$116  [##RST##4]  149.86,84.2 90 bottom
U$117  [#3#3V#6]  157.48,84.07 90 bottom
U$118  [#5V#7]  160.02,84.71 90 bottom
U$119  SPARKX-LOGO4  [SPARKX-MEDIUM]  144.78,23.37 0 bottom
U$120  [QWIIC2]  144.78,20.83 0 bottom
U$121  [USB_HUB1]  144.78,18.29 0 bottom
U$122  [USB2514B0]  144.78,15.75 0 bottom
U$123  [QWIIC_5.5MM]  132.08,14.48 0 top
U$124  [##OCS1##3]  147.32,83.82 90 top
U$125  [##OCS2##2]  144.78,83.69 90 top
U$126  [##OCS3##1]  142.24,83.69 90 top
U$127  [##OCS4##0]  139.7,83.69 90 top
U$128  [#CFG0#1]  154.94,83.82 90 top
U$129  [#CFG1#0]  152.4,83.95 90 top
U$130  [#CFG1#0]  152.4,83.95 90 bottom
U$131  [#CFG0#1]  154.94,83.82 90 bottom
U$132  [##OCS1##3]  147.32,83.82 90 bottom
U$133  [##OCS2##2]  144.78,83.69 90 bottom
U$134  [##OCS3##1]  142.24,83.69 90 bottom
U$135  [##OCS4##0]  139.7,83.69 90 bottom
U$136  [PORT40]  49.53,155.96 90 top
U$137  [PORT31]  49.53,138.18 90 top
U$138  [PORT22]  49.53,120.4 90 top
U$139  [PORT13]  49.53,102.62 90 top
U$140  SPARKX-LOGO4  [SPARKX-MEDIUM]  38.1,105.16 0 top
U$141  [#3#3V#0]  33.02,92.84 90 top
U$142  [#SDA#0]  35.56,92.71 90 top
U$143  [#SCL#0]  38.1,92.58 90 top
U$144  [#3#3V#0]  33.02,92.84 90 bottom
U$145  [#SDA#0]  35.56,92.71 90 bottom
U$146  [#SCL#0]  38.1,92.58 90 bottom
U$147  [#GND#0]  30.48,92.71 90 top
U$148  [#GND#0]  30.48,92.71 90 bottom
U$149  [#I�C#1]  29.21,107.57 0 top
U$150  [PWR0]  22.73,116.71 90 top
U$151  [##RST##4]  43.18,165.99 90 top
U$152  [#3#3V#6]  50.8,165.86 90 top
U$153  [#5V#7]  53.34,166.5 90 top
U$154  [#GND#5]  30.48,165.99 90 top
U$155  [#BYP#0]  22.86,139.83 90 top
U$156  [USB2514B0]  38.1,97.54 0 top
U$157  [QWIIC2]  38.1,102.62 0 top
U$158  [USB_HUB1]  38.1,100.08 0 top
U$159  [#LED#0]  29.21,114.43 0 top
U$160  [#GND#5]  30.48,165.99 90 bottom
U$161  [##RST##4]  43.18,165.99 90 bottom
U$162  [#3#3V#6]  50.8,165.86 90 bottom
U$163  [#5V#7]  53.34,166.5 90 bottom
U$164  SPARKX-LOGO4  [SPARKX-MEDIUM]  38.1,105.16 0 bottom
U$165  [QWIIC2]  38.1,102.62 0 bottom
U$166  [USB_HUB1]  38.1,100.08 0 bottom
U$167  [USB2514B0]  38.1,97.54 0 bottom
U$168  [QWIIC_5.5MM]  25.4,96.27 0 top
U$169  [##OCS1##3]  40.64,165.61 90 top
U$170  [##OCS2##2]  38.1,165.48 90 top
U$171  [##OCS3##1]  35.56,165.48 90 top
U$172  [##OCS4##0]  33.02,165.48 90 top
U$173  [#CFG0#1]  48.26,165.61 90 top
U$174  [#CFG1#0]  45.72,165.74 90 top
U$175  [#CFG1#0]  45.72,165.74 90 bottom
U$176  [#CFG0#1]  48.26,165.61 90 bottom
U$177  [##OCS1##3]  40.64,165.61 90 bottom
U$178  [##OCS2##2]  38.1,165.48 90 bottom
U$179  [##OCS3##1]  35.56,165.48 90 bottom
U$180  [##OCS4##0]  33.02,165.48 90 bottom
U$181  [PORT40]  102.87,155.96 90 top
U$182  [PORT31]  102.87,138.18 90 top
U$183  [PORT22]  102.87,120.4 90 top
U$184  [PORT13]  102.87,102.62 90 top
U$185  SPARKX-LOGO4  [SPARKX-MEDIUM]  91.44,105.16 0 top
U$186  [#3#3V#0]  86.36,92.84 90 top
U$187  [#SDA#0]  88.9,92.71 90 top
U$188  [#SCL#0]  91.44,92.58 90 top
U$189  [#3#3V#0]  86.36,92.84 90 bottom
U$190  [#SDA#0]  88.9,92.71 90 bottom
U$191  [#SCL#0]  91.44,92.58 90 bottom
U$192  [#GND#0]  83.82,92.71 90 top
U$193  [#GND#0]  83.82,92.71 90 bottom
U$194  [#I�C#1]  82.55,107.57 0 top
U$195  [PWR0]  76.07,116.71 90 top
U$196  [##RST##4]  96.52,165.99 90 top
U$197  [#3#3V#6]  104.14,165.86 90 top
U$198  [#5V#7]  106.68,166.5 90 top
U$199  [#GND#5]  83.82,165.99 90 top
U$200  [#BYP#0]  76.2,139.83 90 top
U$201  [USB2514B0]  91.44,97.54 0 top
U$202  [QWIIC2]  91.44,102.62 0 top
U$203  [USB_HUB1]  91.44,100.08 0 top
U$204  [#LED#0]  82.55,114.43 0 top
U$205  [#GND#5]  83.82,165.99 90 bottom
U$206  [##RST##4]  96.52,165.99 90 bottom
U$207  [#3#3V#6]  104.14,165.86 90 bottom
U$208  [#5V#7]  106.68,166.5 90 bottom
U$209  SPARKX-LOGO4  [SPARKX-MEDIUM]  91.44,105.16 0 bottom
U$210  [QWIIC2]  91.44,102.62 0 bottom
U$211  [USB_HUB1]  91.44,100.08 0 bottom
U$212  [USB2514B0]  91.44,97.54 0 bottom
U$213  [QWIIC_5.5MM]  78.74,96.27 0 top
U$214  [##OCS1##3]  93.98,165.61 90 top
U$215  [##OCS2##2]  91.44,165.48 90 top
U$216  [##OCS3##1]  88.9,165.48 90 top
U$217  [##OCS4##0]  86.36,165.48 90 top
U$218  [#CFG0#1]  101.6,165.61 90 top
U$219  [#CFG1#0]  99.06,165.74 90 top
U$220  [#CFG1#0]  99.06,165.74 90 bottom
U$221  [#CFG0#1]  101.6,165.61 90 bottom
U$222  [##OCS1##3]  93.98,165.61 90 bottom
U$223  [##OCS2##2]  91.44,165.48 90 bottom
U$224  [##OCS3##1]  88.9,165.48 90 bottom
U$225  [##OCS4##0]  86.36,165.48 90 bottom
U$226  [PORT40]  156.21,155.96 90 top
U$227  [PORT31]  156.21,138.18 90 top
U$228  [PORT22]  156.21,120.4 90 top
U$229  [PORT13]  156.21,102.62 90 top
U$230  SPARKX-LOGO4  [SPARKX-MEDIUM]  144.78,105.16 0 top
U$231  [#3#3V#0]  139.7,92.84 90 top
U$232  [#SDA#0]  142.24,92.71 90 top
U$233  [#SCL#0]  144.78,92.58 90 top
U$234  [#3#3V#0]  139.7,92.84 90 bottom
U$235  [#SDA#0]  142.24,92.71 90 bottom
U$236  [#SCL#0]  144.78,92.58 90 bottom
U$237  [#GND#0]  137.16,92.71 90 top
U$238  [#GND#0]  137.16,92.71 90 bottom
U$239  [#I�C#1]  135.89,107.57 0 top
U$240  [PWR0]  129.41,116.71 90 top
U$241  [##RST##4]  149.86,165.99 90 top
U$242  [#3#3V#6]  157.48,165.86 90 top
U$243  [#5V#7]  160.02,166.5 90 top
U$244  [#GND#5]  137.16,165.99 90 top
U$245  [#BYP#0]  129.54,139.83 90 top
U$246  [USB2514B0]  144.78,97.54 0 top
U$247  [QWIIC2]  144.78,102.62 0 top
U$248  [USB_HUB1]  144.78,100.08 0 top
U$249  [#LED#0]  135.89,114.43 0 top
U$250  [#GND#5]  137.16,165.99 90 bottom
U$251  [##RST##4]  149.86,165.99 90 bottom
U$252  [#3#3V#6]  157.48,165.86 90 bottom
U$253  [#5V#7]  160.02,166.5 90 bottom
U$254  SPARKX-LOGO4  [SPARKX-MEDIUM]  144.78,105.16 0 bottom
U$255  [QWIIC2]  144.78,102.62 0 bottom
U$256  [USB_HUB1]  144.78,100.08 0 bottom
U$257  [USB2514B0]  144.78,97.54 0 bottom
U$258  [QWIIC_5.5MM]  132.08,96.27 0 top
U$259  [##OCS1##3]  147.32,165.61 90 top
U$260  [##OCS2##2]  144.78,165.48 90 top
U$261  [##OCS3##1]  142.24,165.48 90 top
U$262  [##OCS4##0]  139.7,165.48 90 top
U$263  [#CFG0#1]  154.94,165.61 90 top
U$264  [#CFG1#0]  152.4,165.74 90 top
U$265  [#CFG1#0]  152.4,165.74 90 bottom
U$266  [#CFG0#1]  154.94,165.61 90 bottom
U$267  [##OCS1##3]  147.32,165.61 90 bottom
U$268  [##OCS2##2]  144.78,165.48 90 bottom
U$269  [##OCS3##1]  142.24,165.48 90 bottom
U$270  [##OCS4##0]  139.7,165.48 90 bottom
Y1  24MHz  [CRYSTAL-SMD-2.0X1.6MM]  35.56,39.88 0 top
Y2  24MHz  [CRYSTAL-SMD-2.0X1.6MM]  88.9,39.88 0 top
Y3  24MHz  [CRYSTAL-SMD-2.0X1.6MM]  142.24,39.88 0 top
Y4  24MHz  [CRYSTAL-SMD-2.0X1.6MM]  35.56,121.67 0 top
Y5  24MHz  [CRYSTAL-SMD-2.0X1.6MM]  88.9,121.67 0 top
Y6  24MHz  [CRYSTAL-SMD-2.0X1.6MM]  142.24,121.67 0 top

## Library data of the parts
BYP BYP1-BYP5 JP5 JP10 JP19 JP29 JP39 JP49 PWR PWR1-PWR5 = SparkFun-Jumpers
C1 C2 C13 C14 C22 C23 C31 C32 C40 C41 C49 C50 = SparkFun-Capacitors; PROD_ID: CAP-08267
C3 C5 C7-C9 C11 C15-C18 C20 C24-C27 C29 C33-C36 C38 C42-C45 C47 C51-C54 = SparkFun-Capacitors; PROD_ID: CAP-08604
C4 C6 C10 C12 C19 C21 C28 C30 C37 C39 C46 C48 = SparkFun-Capacitors; PROD_ID: CAP-13930
D1 D3 D5 D8 D10 D12 = SparkFun-DiscreteSemi; PROD_ID: DIO-14072
D2 D4 D6 D7 D9 D11 = SparkFun-IC-Power; PROD_ID: DIO-14084
E$1-E$4 LOGO1-LOGO12 U$42 U$78 U$123 U$168 U$213 U$258 = SparkFun-Aesthetics
E$5 E$6 = SparkFun-Retired
F1-F6 = SparkFun-Fuses; PROD_ID: RES-14313
J1 J6 J8 J9 J14-J17 J23-J26 J32-J35 J41-J44 J50-J53 = SparkFun-Connectors; PROD_ID: CONN-09520; SF_ID: PRT-09011
J2 J4 J7 J12 J19 J21 J28 J30 J37 J39 J46 J48 = SparkFun-Connectors; PROD_ID: CONN-13694
J3 J11 J20 J29 J38 J47 U$5 U$38 U$50 U$74 U$95 U$119 U$140 U$164 U$185 U$209 U$230 U$254 = SparkX
J5 J13 J22 J31 J40 J49 = SparkFun-Connectors; PROD_ID: CONN-14122
J10 J18 J27 J36 J45 J54 = SparkFun-Connectors
JP1-JP4 JP6-JP9 JP11-JP18 JP20-JP28 JP30-JP38 JP40-JP48 JP61 JP71 JP81 JP91 JP101 = SparkFun
LED1-LED6 = SparkFun-LED; PROD_ID: DIO-00819
Q1-Q24 = SparkFun-DiscreteSemi; PROD_ID: TRANS-11153
R1 R18 R37 R55 R73 R91 = SparkFun-Resistors; PROD_ID: RES-07856
R2 R22 R41 R59 R77 R95 = SparkFun-Resistors; PROD_ID: RES-07868
R3-R11 R23-R25 R27-R32 R42-R50 R60-R68 R78-R86 R96-R104 = SparkFun-Resistors; PROD_ID: RES-07828
R12 R13 R33 R34 R51 R52 R69 R70 R87 R88 R105 R106 = SparkFun-Resistors; PROD_ID: RES-08272
R14 R15 R35 R36 R53 R54 R71 R72 R89 R90 R107 R108 = SparkFun-Resistors; PROD_ID: RES-08698
R16 R17 R19 R20 R38 R39 R56 R57 R74 R75 R92 R93 = SparkFun-Resistors; PROD_ID: RES-12083
R21 R26 R40 R58 R76 R94 = SparkFun-Resistors; PROD_ID: RES-10327
U1 U4 U6 U8 U10 U12 = USB251xB; PROD_ID: IC-15827
U2 U3 U5 U7 U9 U11 = SparkFun-IC-Power; PROD_ID: VREG-12457
U$1-U$4 U$6-U$37 U$39-U$41 U$43-U$49 U$51-U$73 U$75-U$77 U$79-U$94 U$96-U$118 U$120-U$122 U$124-U$139 U$141-U$163 U$165-U$167 U$169-U$184 U$186-U$208 U$210-U$212 U$214-U$229 U$231-U$253 U$255-U$257 U$259-U$270 = output
Y1-Y6 = SparkFun-Clocks; PROD_ID: XTAL-14845

## Nets
3.3V [3.3V]: C4.1 C5.2 D1.C J10.9 JP5.2 PWR.2 R5.2 U1.5 U1.10 U1.15 U1.23 U1.29 U1.36 U2.5
3.3V1 [3.3V]: C10.1 C11.2 D3.C J18.9 JP10.2 PWR1.2 R25.2 U3.5 U4.5 U4.10 U4.15 U4.23 U4.29 U4.36
3.3V2 [3.3V]: C19.1 C20.2 D5.C J27.9 JP19.2 PWR2.2 R44.2 U5.5 U6.5 U6.10 U6.15 U6.23 U6.29 U6.36
3.3V3 [3.3V]: C28.1 C29.2 D8.C J36.9 JP29.2 PWR3.2 R62.2 U7.5 U8.5 U8.10 U8.15 U8.23 U8.29 U8.36
3.3V4 [3.3V]: C37.1 C38.2 D10.C J45.9 JP39.2 PWR4.2 R80.2 U9.5 U10.5 U10.10 U10.15 U10.23 U10.29 U10.36
3.3V5 [3.3V]: C46.1 C47.2 D12.C J54.9 JP49.2 PWR5.2 R98.2 U11.5 U12.5 U12.10 U12.15 U12.23 U12.29 U12.36
5V: BYP.2 C6.1 D6.5 F1.2 J10.10 Q1.2 Q2.2 Q3.2 Q4.2 R7.2 R8.1 R9.1 R10.1 R11.1 U2.1 U2.3
5V1: BYP1.2 C12.1 D2.5 F2.2 J18.10 Q5.2 Q6.2 Q7.2 Q8.2 R28.2 R29.1 R30.1 R31.1 R32.1 U3.1 U3.3
5V2: BYP2.2 C21.1 D4.5 F3.2 J27.10 Q9.2 Q10.2 Q11.2 Q12.2 R46.2 R47.1 R48.1 R49.1 R50.1 U5.1 U5.3
5V3: BYP3.2 C30.1 D7.5 F4.2 J36.10 Q13.2 Q14.2 Q15.2 Q16.2 R64.2 R65.1 R66.1 R67.1 R68.1 U7.1 U7.3
5V4: BYP4.2 C39.1 D9.5 F5.2 J45.10 Q17.2 Q18.2 Q19.2 Q20.2 R82.2 R83.1 R84.1 R85.1 R86.1 U9.1 U9.3
5V5: BYP5.2 C48.1 D11.5 F6.2 J54.10 Q21.2 Q22.2 Q23.2 Q24.2 R100.2 R101.1 R102.1 R103.1 R104.1 U11.1 U11.3
!OCS1: J10.5 U1.13
!OCS2: J10.4 U1.17
!OCS3: J10.3 U1.19
!OCS4: J10.2 U1.21
!OCS5: J18.5 U4.13
!OCS6: J18.4 U4.17
!OCS7: J18.3 U4.19
!OCS8: J18.2 U4.21
!OCS9: J27.5 U6.13
!OCS10: J27.4 U6.17
!OCS11: J27.3 U6.19
!OCS12: J27.2 U6.21
!OCS13: J36.5 U8.13
!OCS14: J36.4 U8.17
!OCS15: J36.3 U8.19
!OCS16: J36.2 U8.21
!OCS17: J45.5 U10.13
!OCS18: J45.4 U10.17
!OCS19: J45.3 U10.19
!OCS20: J45.2 U10.21
!OCS21: J54.5 U12.13
!OCS22: J54.4 U12.17
!OCS23: J54.3 U12.19
!OCS24: J54.2 U12.21
!RESET: C8.1 J10.6 R5.1 U1.26
!RESET1: C17.1 J18.6 R25.1 U4.26
!RESET2: C26.1 J27.6 R44.1 U6.26
!RESET3: C35.1 J36.6 R62.1 U8.26
!RESET4: C44.1 J45.6 R80.1 U10.26
!RESET5: C53.1 J54.6 R98.1 U12.26
CC1: J5.A5 R17.2
CC2: J5.B5 R16.2
CC3: J13.A5 R20.2
CC4: J13.B5 R19.2
CC5: J22.A5 R39.2
CC6: J22.B5 R38.2
CC7: J31.A5 R57.2
CC8: J31.B5 R56.2
CC9: J40.A5 R75.2
CC10: J40.B5 R74.2
CC11: J49.A5 R93.2
CC12: J49.B5 R92.2
CFG1: J10.7 R4.2 U1.25
CFG2: J18.7 R24.2 U4.25
CFG3: J27.7 R43.2 U6.25
CFG4: J36.7 R61.2 U8.25
CFG5: J45.7 R79.2 U10.25
CFG6: J54.7 R97.2 U12.25
D_N: D6.6 R14.1
D_N1: D2.6 R35.1
D_N2: D4.6 R53.1
D_N3: D7.6 R71.1
D_N4: D9.6 R89.1
D_N5: D11.6 R107.1
D_P: D6.4 R15.1
D_P1: D2.4 R36.1
D_P2: D4.4 R54.1
D_P3: D7.4 R72.1
D_P4: D9.4 R90.1
D_P5: D11.4 R108.1
GND: C1.1 C2.1 C3.2 C4.2 C5.1 C6.2 C7.2 C8.2 C9.2 D6.2 J1.GND J2.1 J3.1 J4.1 J5.GND J5.GND2 J5.SHLD1 J5.SHLD2 J5.SHLD3 J5.SHLD4 J6.GND J8.GND J9.GND J10.1 LED2.C R3.1 R4.1 R6.1 R16.1 R17.1 R26.2 U1.11 U1.EP U2.2
GND1: C10.2 C11.1 C12.2 C13.1 C14.1 C15.2 C16.2 C17.2 C18.2 D2.2 J7.1 J11.1 J12.1 J13.GND J13.GND2 J13.SHLD1 J13.SHLD2 J13.SHLD3 J13.SHLD4 J14.GND J15.GND J16.GND J17.GND J18.1 LED1.C R19.1 R20.1 R21.2 R23.1 R24.1 R27.1 U3.2 U4.11 U4.EP
GND2: C19.2 C20.1 C21.2 C22.1 C23.1 C24.2 C25.2 C26.2 C27.2 D4.2 J19.1 J20.1 J21.1 J22.GND J22.GND2 J22.SHLD1 J22.SHLD2 J22.SHLD3 J22.SHLD4 J23.GND J24.GND J25.GND J26.GND J27.1 LED3.C R38.1 R39.1 R40.2 R42.1 R43.1 R45.1 U5.2 U6.11 U6.EP
GND3: C28.2 C29.1 C30.2 C31.1 C32.1 C33.2 C34.2 C35.2 C36.2 D7.2 J28.1 J29.1 J30.1 J31.GND J31.GND2 J31.SHLD1 J31.SHLD2 J31.SHLD3 J31.SHLD4 J32.GND J33.GND J34.GND J35.GND J36.1 LED4.C R56.1 R57.1 R58.2 R60.1 R61.1 R63.1 U7.2 U8.11 U8.EP
GND4: C37.2 C38.1 C39.2 C40.1 C41.1 C42.2 C43.2 C44.2 C45.2 D9.2 J37.1 J38.1 J39.1 J40.GND J40.GND2 J40.SHLD1 J40.SHLD2 J40.SHLD3 J40.SHLD4 J41.GND J42.GND J43.GND J44.GND J45.1 LED5.C R74.1 R75.1 R76.2 R78.1 R79.1 R81.1 U9.2 U10.11 U10.EP
GND5: C46.2 C47.1 C48.2 C49.1 C50.1 C51.2 C52.2 C53.2 C54.2 D11.2 J46.1 J47.1 J48.1 J49.GND J49.GND2 J49.SHLD1 J49.SHLD2 J49.SHLD3 J49.SHLD4 J50.GND J51.GND J52.GND J53.GND J54.1 LED6.C R92.1 R93.1 R94.2 R96.1 R97.1 R99.1 U11.2 U12.11 U12.EP
N$1: J1.VBUS Q1.3
N$2: J6.VBUS Q2.3
N$3: J8.VBUS Q3.3
N$4: J9.VBUS Q4.3
N$5: R26.1 U1.35
N$6: C1.2 R2.2 U1.33 Y1.3
N$7: BYP.1 F1.1 J5.VBUS1 J5.VBUS2
N$8: C2.2 R2.1 U1.32 Y1.1
N$9: JP5.1 R13.2
N$10: LED2.A R1.1
N$11: R3.2 U1.28
N$12: LED1.A R18.1
N$13: C3.1 U1.34
N$14: C7.1 U1.14
N$15: JP5.3 R12.2
N$16: R14.2 U1.30
N$17: PWR.1 R1.2
N$18: R15.2 U1.31
N$19: PWR1.1 R18.2
N$20: C13.2 R22.2 U4.33 Y2.3
N$21 [3.3V]: D1.A J2.2 J3.2 J4.2
N$22: C14.2 R22.1 U4.32 Y2.1
N$23: R21.1 U4.35
N$24: R23.2 U4.28
N$25: C15.1 U4.34
N$26: C16.1 U4.14
N$27: J14.VBUS Q5.3
N$28: J15.VBUS Q6.3
N$29: J16.VBUS Q7.3
N$30: J17.VBUS Q8.3
N$31: BYP1.1 F2.1 J13.VBUS1 J13.VBUS2
N$32: JP10.1 R34.2
N$33: JP10.3 R33.2
N$34: R35.2 U4.30
N$35: R36.2 U4.31
N$36 [3.3V]: D3.A J7.2 J11.2 J12.2
N$37: LED3.A R37.1
N$38: PWR2.1 R37.2
N$39: C22.2 R41.2 U6.33 Y3.3
N$40: C23.2 R41.1 U6.32 Y3.1
N$41: R40.1 U6.35
N$42: R42.2 U6.28
N$43: C24.1 U6.34
N$44: C25.1 U6.14
N$45: J23.VBUS Q9.3
N$46: J24.VBUS Q10.3
N$47: J25.VBUS Q11.3
N$48: J26.VBUS Q12.3
N$49: BYP2.1 F3.1 J22.VBUS1 J22.VBUS2
N$50: JP19.1 R52.2
N$51: JP19.3 R51.2
N$52: R53.2 U6.30
N$53: R54.2 U6.31
N$54 [3.3V]: D5.A J19.2 J20.2 J21.2
N$55: LED4.A R55.1
N$56: PWR3.1 R55.2
N$57: C31.2 R59.2 U8.33 Y4.3
N$58: C32.2 R59.1 U8.32 Y4.1
N$59: R58.1 U8.35
N$60: R60.2 U8.28
N$61: C33.1 U8.34
N$62: C34.1 U8.14
N$63: J32.VBUS Q13.3
N$64: J33.VBUS Q14.3
N$65: J34.VBUS Q15.3
N$66: J35.VBUS Q16.3
N$67: BYP3.1 F4.1 J31.VBUS1 J31.VBUS2
N$68: JP29.1 R70.2
N$69: JP29.3 R69.2
N$70: R71.2 U8.30
N$71: R72.2 U8.31
N$72 [3.3V]: D8.A J28.2 J29.2 J30.2
N$73: LED5.A R73.1
N$74: PWR4.1 R73.2
N$75: C40.2 R77.2 U10.33 Y5.3
N$76: C41.2 R77.1 U10.32 Y5.1
N$77: R76.1 U10.35
N$78: R78.2 U10.28
N$79: C42.1 U10.34
N$80: C43.1 U10.14
N$81: J41.VBUS Q17.3
N$82: J42.VBUS Q18.3
N$83: J43.VBUS Q19.3
N$84: J44.VBUS Q20.3
N$85: BYP4.1 F5.1 J40.VBUS1 J40.VBUS2
N$86: JP39.1 R88.2
N$87: JP39.3 R87.2
N$88: R89.2 U10.30
N$89: R90.2 U10.31
N$90 [3.3V]: D10.A J37.2 J38.2 J39.2
N$91: LED6.A R91.1
N$92: PWR5.1 R91.2
N$93: C49.2 R95.2 U12.33 Y6.3
N$94: C50.2 R95.1 U12.32 Y6.1
N$95: R94.1 U12.35
N$96: R96.2 U12.28
N$97: C51.1 U12.34
N$98: C52.1 U12.14
N$99: J50.VBUS Q21.3
N$100: J51.VBUS Q22.3
N$101: J52.VBUS Q23.3
N$102: J53.VBUS Q24.3
N$103: BYP5.1 F6.1 J49.VBUS1 J49.VBUS2
N$104: JP49.1 R106.2
N$105: JP49.3 R105.2
N$106: R107.2 U12.30
N$107: R108.2 U12.31
N$108 [3.3V]: D12.A J46.2 J47.2 J48.2
PORT1_N: J1.D- U1.1
PORT1_N1: J14.D- U4.1
PORT1_N2: J23.D- U6.1
PORT1_N3: J32.D- U8.1
PORT1_N4: J41.D- U10.1
PORT1_N5: J50.D- U12.1
PORT1_P: J1.D+ U1.2
PORT1_P1: J14.D+ U4.2
PORT1_P2: J23.D+ U6.2
PORT1_P3: J32.D+ U8.2
PORT1_P4: J41.D+ U10.2
PORT1_P5: J50.D+ U12.2
PORT2_N: J6.D- U1.3
PORT2_N1: J15.D- U4.3
PORT2_N2: J24.D- U6.3
PORT2_N3: J33.D- U8.3
PORT2_N4: J42.D- U10.3
PORT2_N5: J51.D- U12.3
PORT2_P: J6.D+ U1.4
PORT2_P1: J15.D+ U4.4
PORT2_P2: J24.D+ U6.4
PORT2_P3: J33.D+ U8.4
PORT2_P4: J42.D+ U10.4
PORT2_P5: J51.D+ U12.4
PORT3_N: J8.D- U1.6
PORT3_N1: J16.D- U4.6
PORT3_N2: J25.D- U6.6
PORT3_N3: J34.D- U8.6
PORT3_N4: J43.D- U10.6
PORT3_N5: J52.D- U12.6
PORT3_P: J8.D+ U1.7
PORT3_P1: J16.D+ U4.7
PORT3_P2: J25.D+ U6.7
PORT3_P3: J34.D+ U8.7
PORT3_P4: J43.D+ U10.7
PORT3_P5: J52.D+ U12.7
PORT4_N: J9.D- U1.8
PORT4_N1: J17.D- U4.8
PORT4_N2: J26.D- U6.8
PORT4_N3: J35.D- U8.8
PORT4_N4: J44.D- U10.8
PORT4_N5: J53.D- U12.8
PORT4_P: J9.D+ U1.9
PORT4_P1: J17.D+ U4.9
PORT4_P2: J26.D+ U6.9
PORT4_P3: J35.D+ U8.9
PORT4_P4: J44.D+ U10.9
PORT4_P5: J53.D+ U12.9
PRTPWR1: Q1.1 R8.2 U1.12
PRTPWR2: Q2.1 R9.2 U1.16
PRTPWR3: Q3.1 R10.2 U1.18
PRTPWR4: Q4.1 R11.2 U1.20
PRTPWR5: Q5.1 R29.2 U4.12
PRTPWR6: Q6.1 R30.2 U4.16
PRTPWR7: Q7.1 R31.2 U4.18
PRTPWR8: Q8.1 R32.2 U4.20
PRTPWR9: Q9.1 R47.2 U6.12
PRTPWR10: Q10.1 R48.2 U6.16
PRTPWR11: Q11.1 R49.2 U6.18
PRTPWR12: Q12.1 R50.2 U6.20
PRTPWR13: Q13.1 R65.2 U8.12
PRTPWR14: Q14.1 R66.2 U8.16
PRTPWR15: Q15.1 R67.2 U8.18
PRTPWR16: Q16.1 R68.2 U8.20
PRTPWR17: Q17.1 R83.2 U10.12
PRTPWR18: Q18.1 R84.2 U10.16
PRTPWR19: Q19.1 R85.2 U10.18
PRTPWR20: Q20.1 R86.2 U10.20
PRTPWR21: Q21.1 R101.2 U12.12
PRTPWR22: Q22.1 R102.2 U12.16
PRTPWR23: Q23.1 R103.2 U12.18
PRTPWR24: Q24.1 R104.2 U12.20
SCL/CFG0: J2.4 J3.4 J4.4 J10.8 R13.1 U1.24
SCL/CFG1: J7.4 J11.4 J12.4 J18.8 R34.1 U4.24
SCL/CFG2: J19.4 J20.4 J21.4 J27.8 R52.1 U6.24
SCL/CFG3: J28.4 J29.4 J30.4 J36.8 R70.1 U8.24
SCL/CFG4: J37.4 J38.4 J39.4 J45.8 R88.1 U10.24
SCL/CFG5: J46.4 J47.4 J48.4 J54.8 R106.1 U12.24
SDA: J2.3 J3.3 J4.3 R12.1 U1.22
SDA1: J7.3 J11.3 J12.3 R33.1 U4.22
SDA2: J19.3 J20.3 J21.3 R51.1 U6.22
SDA3: J28.3 J29.3 J30.3 R69.1 U8.22
SDA4: J37.3 J38.3 J39.3 R87.1 U10.22
SDA5: J46.3 J47.3 J48.3 R105.1 U12.22
UNP_D+: D6.3 J5.A6 J5.B6
UNP_D+1: D2.3 J13.A6 J13.B6
UNP_D+2: D4.3 J22.A6 J22.B6
UNP_D+3: D7.3 J31.A6 J31.B6
UNP_D+4: D9.3 J40.A6 J40.B6
UNP_D+5: D11.3 J49.A6 J49.B6
UNP_D-: D6.1 J5.A7 J5.B7
UNP_D-1: D2.1 J13.A7 J13.B7
UNP_D-2: D4.1 J22.A7 J22.B7
UNP_D-3: D7.1 J31.A7 J31.B7
UNP_D-4: D9.1 J40.A7 J40.B7
UNP_D-5: D11.1 J49.A7 J49.B7
VBUS_DET: C9.1 R6.2 R7.1 U1.27
VBUS_DET1: C18.1 R27.2 R28.1 U4.27
VBUS_DET2: C27.1 R45.2 R46.1 U6.27
VBUS_DET3: C36.1 R63.2 R64.1 U8.27
VBUS_DET4: C45.1 R81.2 R82.1 U10.27
VBUS_DET5: C54.1 R99.2 R100.1 U12.27

## Tracks (layer width: path | path; a pad name or v marks a point on that pad's centre or on a via)
3.3V  (via drill 0.3, 0.35)
  Top 0.305: C4.1 34.26,32.71 U2.5 33.08,33.85 v33.02,33.91 32.98,33.95 C5.2 31.75,33.91 | U1.23 v31.75,47.5 | v40.64,47.62 40.64,47.5 U1.5 | U1.29 34.06,44.05 33.82,43.81 33.82,42.07 v33.78,42.04 | U1.36 37.56,43.97 37.97,43.56 v38.23,43.56 | U1.10 37.56,51.15 v37.72,51.31 | U1.15 v35.06,51.43 v35.05,51.43 | R5.2 27.43,49.7 v27.43,51.05 27.43,54.61 29.82,57 29.82,80.49 v29.85,80.52 | 31.75,33.91 31.75,28.45 | JP5.2 31.75,28.45 | PWR.2 30.62,34.28 30.99,33.91 31.75,33.91 | D1.C v24.13,20.83 | v31.75,20.83 31.75,28.45
  Bottom 0.305: 35.56,41.91 33.91,41.91 v33.78,42.04 33.02,41.27 v33.02,33.91 | 35.56,41.91 36.58,41.91 v38.23,43.56 39.62,43.56 40.64,44.58 v40.64,47.62 40.64,50.04 39.37,51.31 v37.72,51.31 37.59,51.43 v35.05,51.43 | v27.43,51.05 29.87,48.62 30.25,48.62 31.36,47.5 v31.75,47.5 31.88,47.5 35.56,43.81 35.56,41.91 | J10.9 44.45,80.52 v29.85,80.52 | v24.13,20.83 v31.75,20.83
3.3V1  (via drill 0.3, 0.35)
  Top 0.305: C10.1 87.6,32.71 U3.5 86.42,33.85 v86.36,33.91 86.32,33.95 C11.2 85.09,33.91 | U4.23 v85.09,47.5 | v93.98,47.62 93.98,47.5 U4.5 | U4.29 87.4,44.05 87.16,43.81 87.16,42.07 v87.12,42.04 | U4.36 90.9,43.97 91.31,43.56 v91.57,43.56 | U4.10 90.9,51.15 v91.06,51.31 | U4.15 v88.4,51.43 v88.39,51.43 | R25.2 80.77,49.7 v80.77,51.05 80.77,54.61 83.16,57 83.16,80.49 v83.19,80.52 | 85.09,33.91 85.09,28.45 | JP10.2 85.09,28.45 | PWR1.2 83.96,34.28 84.33,33.91 85.09,33.91 | D3.C v77.47,20.83 | v85.09,20.83 85.09,28.45
  Bottom 0.305: 88.9,41.91 87.25,41.91 v87.12,42.04 86.36,41.27 v86.36,33.91 | 88.9,41.91 89.92,41.91 v91.57,43.56 92.96,43.56 93.98,44.58 v93.98,47.62 93.98,50.04 92.71,51.31 v91.06,51.31 90.93,51.43 v88.39,51.43 | v80.77,51.05 83.21,48.62 83.59,48.62 84.7,47.5 v85.09,47.5 85.22,47.5 88.9,43.81 88.9,41.91 | J18.9 97.79,80.52 v83.19,80.52 | v77.47,20.83 v85.09,20.83
3.3V2  (via drill 0.3, 0.35)
  Top 0.305: C19.1 140.94,32.71 U5.5 139.76,33.85 v139.7,33.91 139.66,33.95 C20.2 138.43,33.91 | U6.23 v138.43,47.5 | v147.32,47.62 147.32,47.5 U6.5 | U6.29 140.74,44.05 140.5,43.81 140.5,42.07 v140.46,42.04 | U6.36 144.24,43.97 144.65,43.56 v144.91,43.56 | U6.10 144.24,51.15 v144.4,51.31 | U6.15 v141.74,51.43 v141.73,51.43 | R44.2 134.11,49.7 v134.11,51.05 134.11,54.61 136.5,57 136.5,80.49 v136.53,80.52 | 138.43,33.91 138.43,28.45 | JP19.2 138.43,28.45 | PWR2.2 137.3,34.28 137.67,33.91 138.43,33.91 | D5.C v130.81,20.83 | v138.43,20.83 138.43,28.45
  Bottom 0.305: 142.24,41.91 140.59,41.91 v140.46,42.04 139.7,41.27 v139.7,33.91 | 142.24,41.91 143.26,41.91 v144.91,43.56 146.3,43.56 147.32,44.58 v147.32,47.62 147.32,50.04 146.05,51.31 v144.4,51.31 144.27,51.43 v141.73,51.43 | v134.11,51.05 136.55,48.62 136.93,48.62 138.04,47.5 v138.43,47.5 138.56,47.5 142.24,43.81 142.24,41.91 | J27.9 151.13,80.52 v136.53,80.52 | v130.81,20.83 v138.43,20.83
3.3V3  (via drill 0.3, 0.35)
  Top 0.305: C28.1 34.26,114.5 U7.5 33.08,115.64 v33.02,115.7 32.98,115.74 C29.2 31.75,115.7 | U8.23 v31.75,129.29 | v40.64,129.41 40.64,129.29 U8.5 | U8.29 34.06,125.84 33.82,125.6 33.82,123.86 v33.78,123.83 | U8.36 37.56,125.76 37.97,125.35 v38.23,125.35 | U8.10 37.56,132.94 v37.72,133.1 | U8.15 v35.06,133.22 v35.05,133.22 | R62.2 27.43,131.48 v27.43,132.84 27.43,136.4 29.82,138.79 29.82,162.28 v29.85,162.31 | 31.75,115.7 31.75,110.24 | JP29.2 31.75,110.24 | PWR3.2 30.62,116.06 30.99,115.7 31.75,115.7 | D8.C v24.13,102.62 | v31.75,102.62 31.75,110.24
  Bottom 0.305: 35.56,123.7 33.91,123.7 v33.78,123.83 33.02,123.06 v33.02,115.7 | 35.56,123.7 36.58,123.7 v38.23,125.35 39.62,125.35 40.64,126.37 v40.64,129.41 40.64,131.83 39.37,133.1 v37.72,133.1 37.59,133.22 v35.05,133.22 | v27.43,132.84 29.87,130.4 30.25,130.4 31.36,129.29 v31.75,129.29 31.88,129.29 35.56,125.6 35.56,123.7 | J36.9 44.45,162.31 v29.85,162.31 | v24.13,102.62 v31.75,102.62
3.3V4  (via drill 0.3, 0.35)
  Top 0.305: C37.1 87.6,114.5 U9.5 86.42,115.64 v86.36,115.7 86.32,115.74 C38.2 85.09,115.7 | U10.23 v85.09,129.29 | v93.98,129.41 93.98,129.29 U10.5 | U10.29 87.4,125.84 87.16,125.6 87.16,123.86 v87.12,123.83 | U10.36 90.9,125.76 91.31,125.35 v91.57,125.35 | U10.10 90.9,132.94 v91.06,133.1 | U10.15 v88.4,133.22 v88.39,133.22 | R80.2 80.77,131.48 v80.77,132.84 80.77,136.4 83.16,138.79 83.16,162.28 v83.19,162.31 | 85.09,115.7 85.09,110.24 | JP39.2 85.09,110.24 | PWR4.2 83.96,116.06 84.33,115.7 85.09,115.7 | D10.C v77.47,102.62 | v85.09,102.62 85.09,110.24
  Bottom 0.305: 88.9,123.7 87.25,123.7 v87.12,123.83 86.36,123.06 v86.36,115.7 | 88.9,123.7 89.92,123.7 v91.57,125.35 92.96,125.35 93.98,126.37 v93.98,129.41 93.98,131.83 92.71,133.1 v91.06,133.1 90.93,133.22 v88.39,133.22 | v80.77,132.84 83.21,130.4 83.59,130.4 84.7,129.29 v85.09,129.29 85.22,129.29 88.9,125.6 88.9,123.7 | J45.9 97.79,162.31 v83.19,162.31 | v77.47,102.62 v85.09,102.62
3.3V5  (via drill 0.3, 0.35)
  Top 0.305: C46.1 140.94,114.5 U11.5 139.76,115.64 v139.7,115.7 139.66,115.74 C47.2 138.43,115.7 | U12.23 v138.43,129.29 | v147.32,129.41 147.32,129.29 U12.5 | U12.29 140.74,125.84 140.5,125.6 140.5,123.86 v140.46,123.83 | U12.36 144.24,125.76 144.65,125.35 v144.91,125.35 | U12.10 144.24,132.94 v144.4,133.1 | U12.15 v141.74,133.22 v141.73,133.22 | R98.2 134.11,131.48 v134.11,132.84 134.11,136.4 136.5,138.79 136.5,162.28 v136.53,162.31 | 138.43,115.7 138.43,110.24 | JP49.2 138.43,110.24 | PWR5.2 137.3,116.06 137.67,115.7 138.43,115.7 | D12.C v130.81,102.62 | v138.43,102.62 138.43,110.24
  Bottom 0.305: 142.24,123.7 140.59,123.7 v140.46,123.83 139.7,123.06 v139.7,115.7 | 142.24,123.7 143.26,123.7 v144.91,125.35 146.3,125.35 147.32,126.37 v147.32,129.41 147.32,131.83 146.05,133.1 v144.4,133.1 144.27,133.22 v141.73,133.22 | v134.11,132.84 136.55,130.4 136.93,130.4 138.04,129.29 v138.43,129.29 138.56,129.29 142.24,125.6 142.24,123.7 | J54.9 151.13,162.31 v136.53,162.31 | v130.81,102.62 v138.43,102.62
5V  (via drill 0.3)
  Top 0.178: D6.5 v26.67,47.5 | R7.2 v26.16,41.15
  Top 0.635: BYP.2 25.04,55.52 25.4,55.88
  Top 0.762: v26.16,58.93 26.16,58.9 25.4,58.14 F1.2 25.4,55.88 | R8.1 v43.18,20.83 | Q1.2 43.45,19.29 v43.18,19.56 | Q2.2 43.2,37.07 v43.18,37.08 | R9.1 v43.18,38.61 | R10.1 v43.18,56.39 | Q3.2 43.2,54.85 v43.18,54.86 | R11.1 v43.18,74.17 | Q4.2 43.2,72.63 v43.18,72.64 | v40.51,34.8 39.66,35.65 C6.1 38.64,35.75 U2.3 35.88,35.75 35.56,35.43 35.56,34.04 35.75,33.85 U2.1
  Bottom 0.178: 26.54,58.93 26.16,58.55 26.16,48.01 v26.67,47.5 26.67,47.33 26.2,46.86 26.2,41.19 v26.16,41.15
  Bottom 0.762: v26.16,58.93 26.54,58.93 43.18,58.93 | 43.18,58.93 v43.18,56.39 v43.18,54.86 v43.18,38.61 v43.18,37.08 43.18,34.8 | 43.18,34.8 v43.18,20.83 v43.18,19.56 | 43.18,58.93 v43.18,72.64 v43.18,74.17 43.18,76.71 J10.10 | v40.51,34.8 43.18,34.8
5V1  (via drill 0.3)
  Top 0.178: D2.5 v80.01,47.5 | R28.2 v79.5,41.15
  Top 0.635: BYP1.2 78.38,55.52 78.74,55.88